# Altium PCB RT_SUPER_B1.PCBdoc (part 1 of 3)
Units mil, origin at the board's own origin, x right, y up, seen from the top; angles counter-clockwise.
Board outline 1617.06 x 1691.18 mil, 4 copper layers (Top Layer, GND, PWR, Bottom Layer), stack 39.556 mil thick; 138 components, 99 nets, 466 pads, 206 vias.
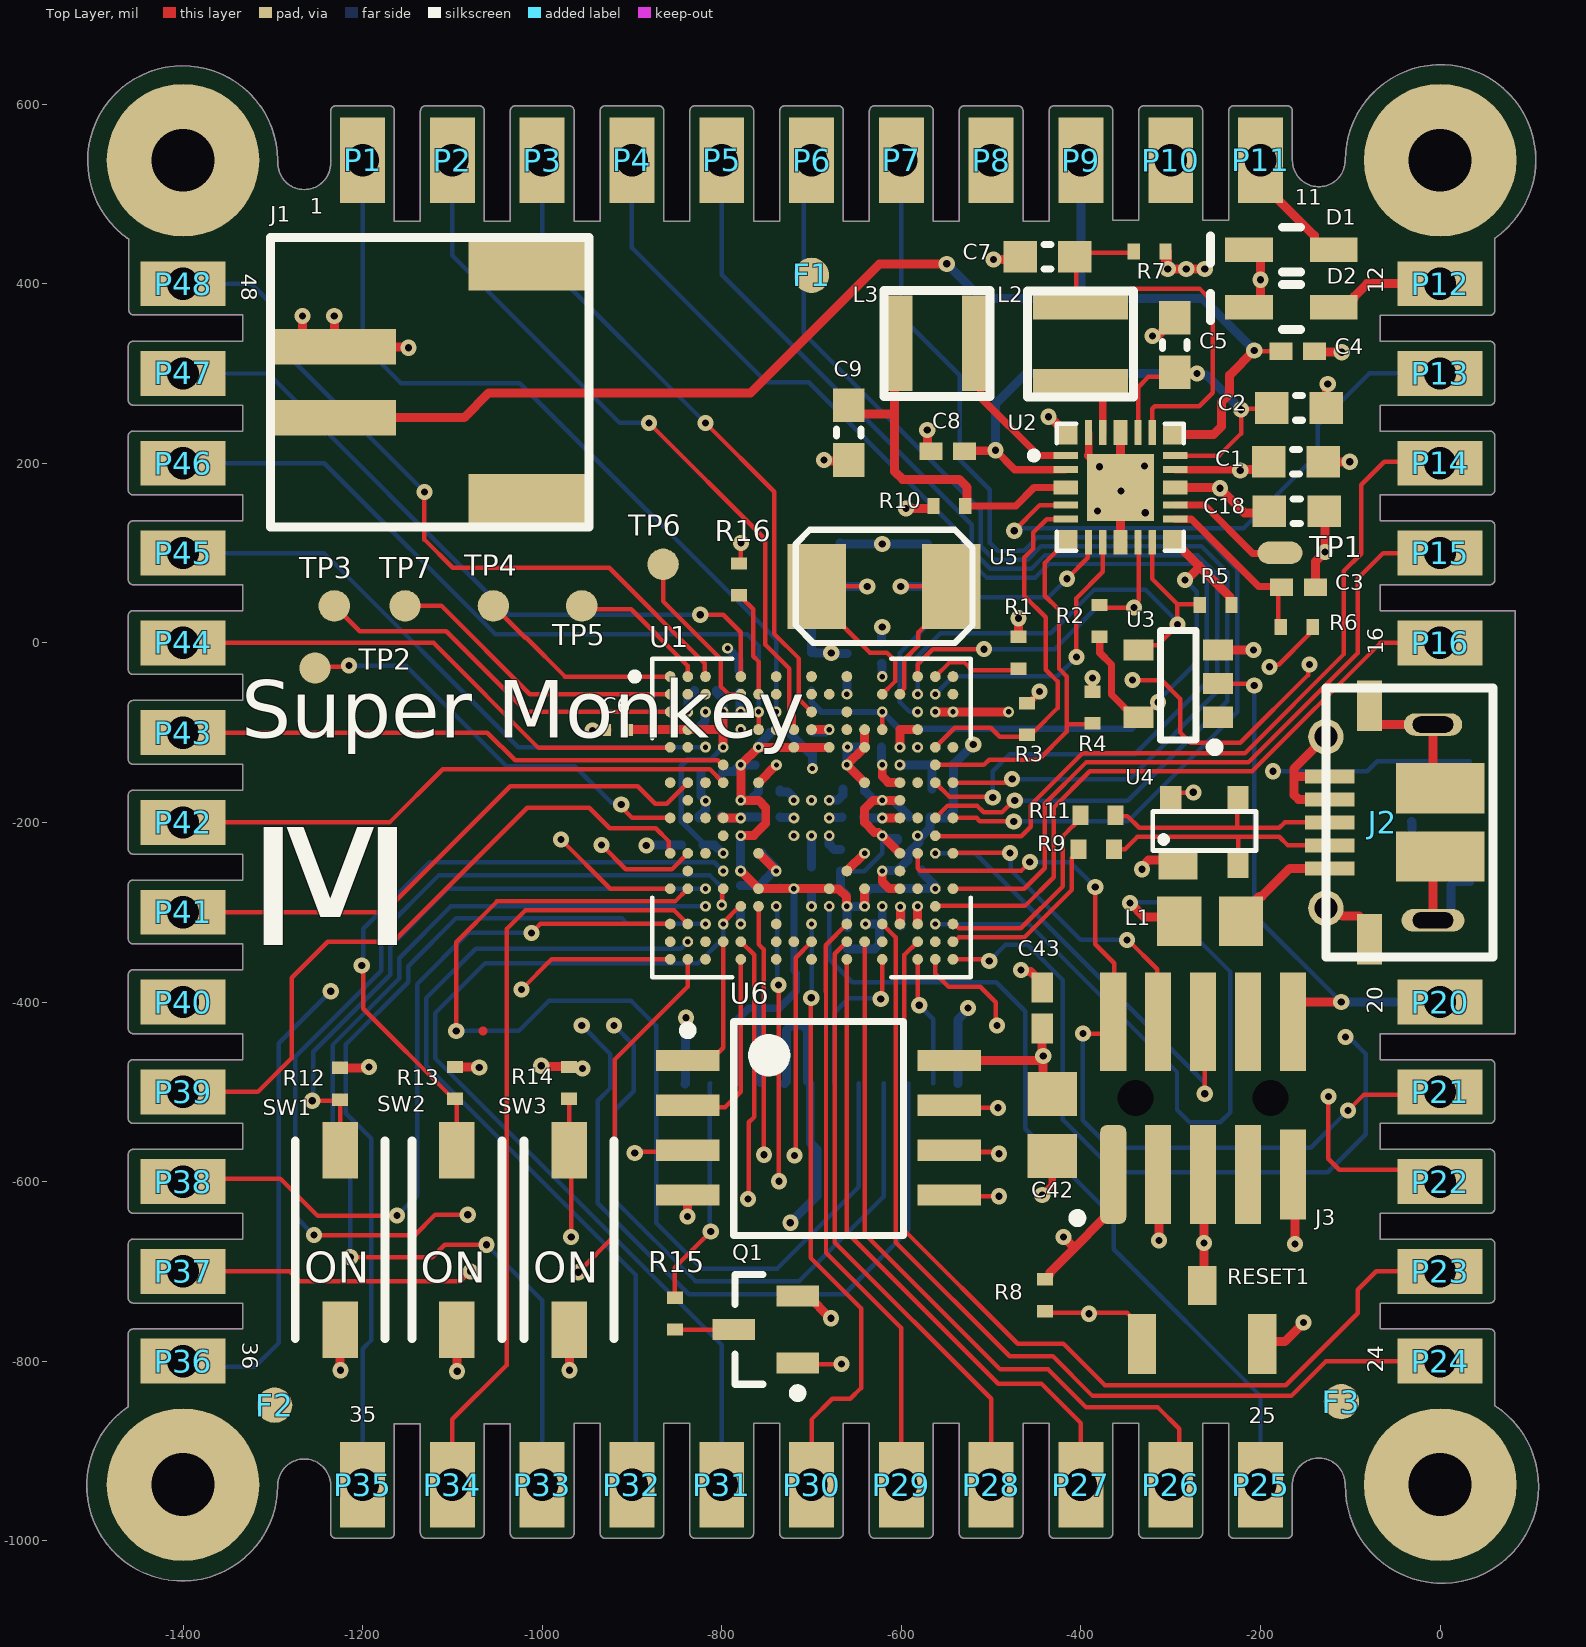
[diagram p0: Top Layer view]
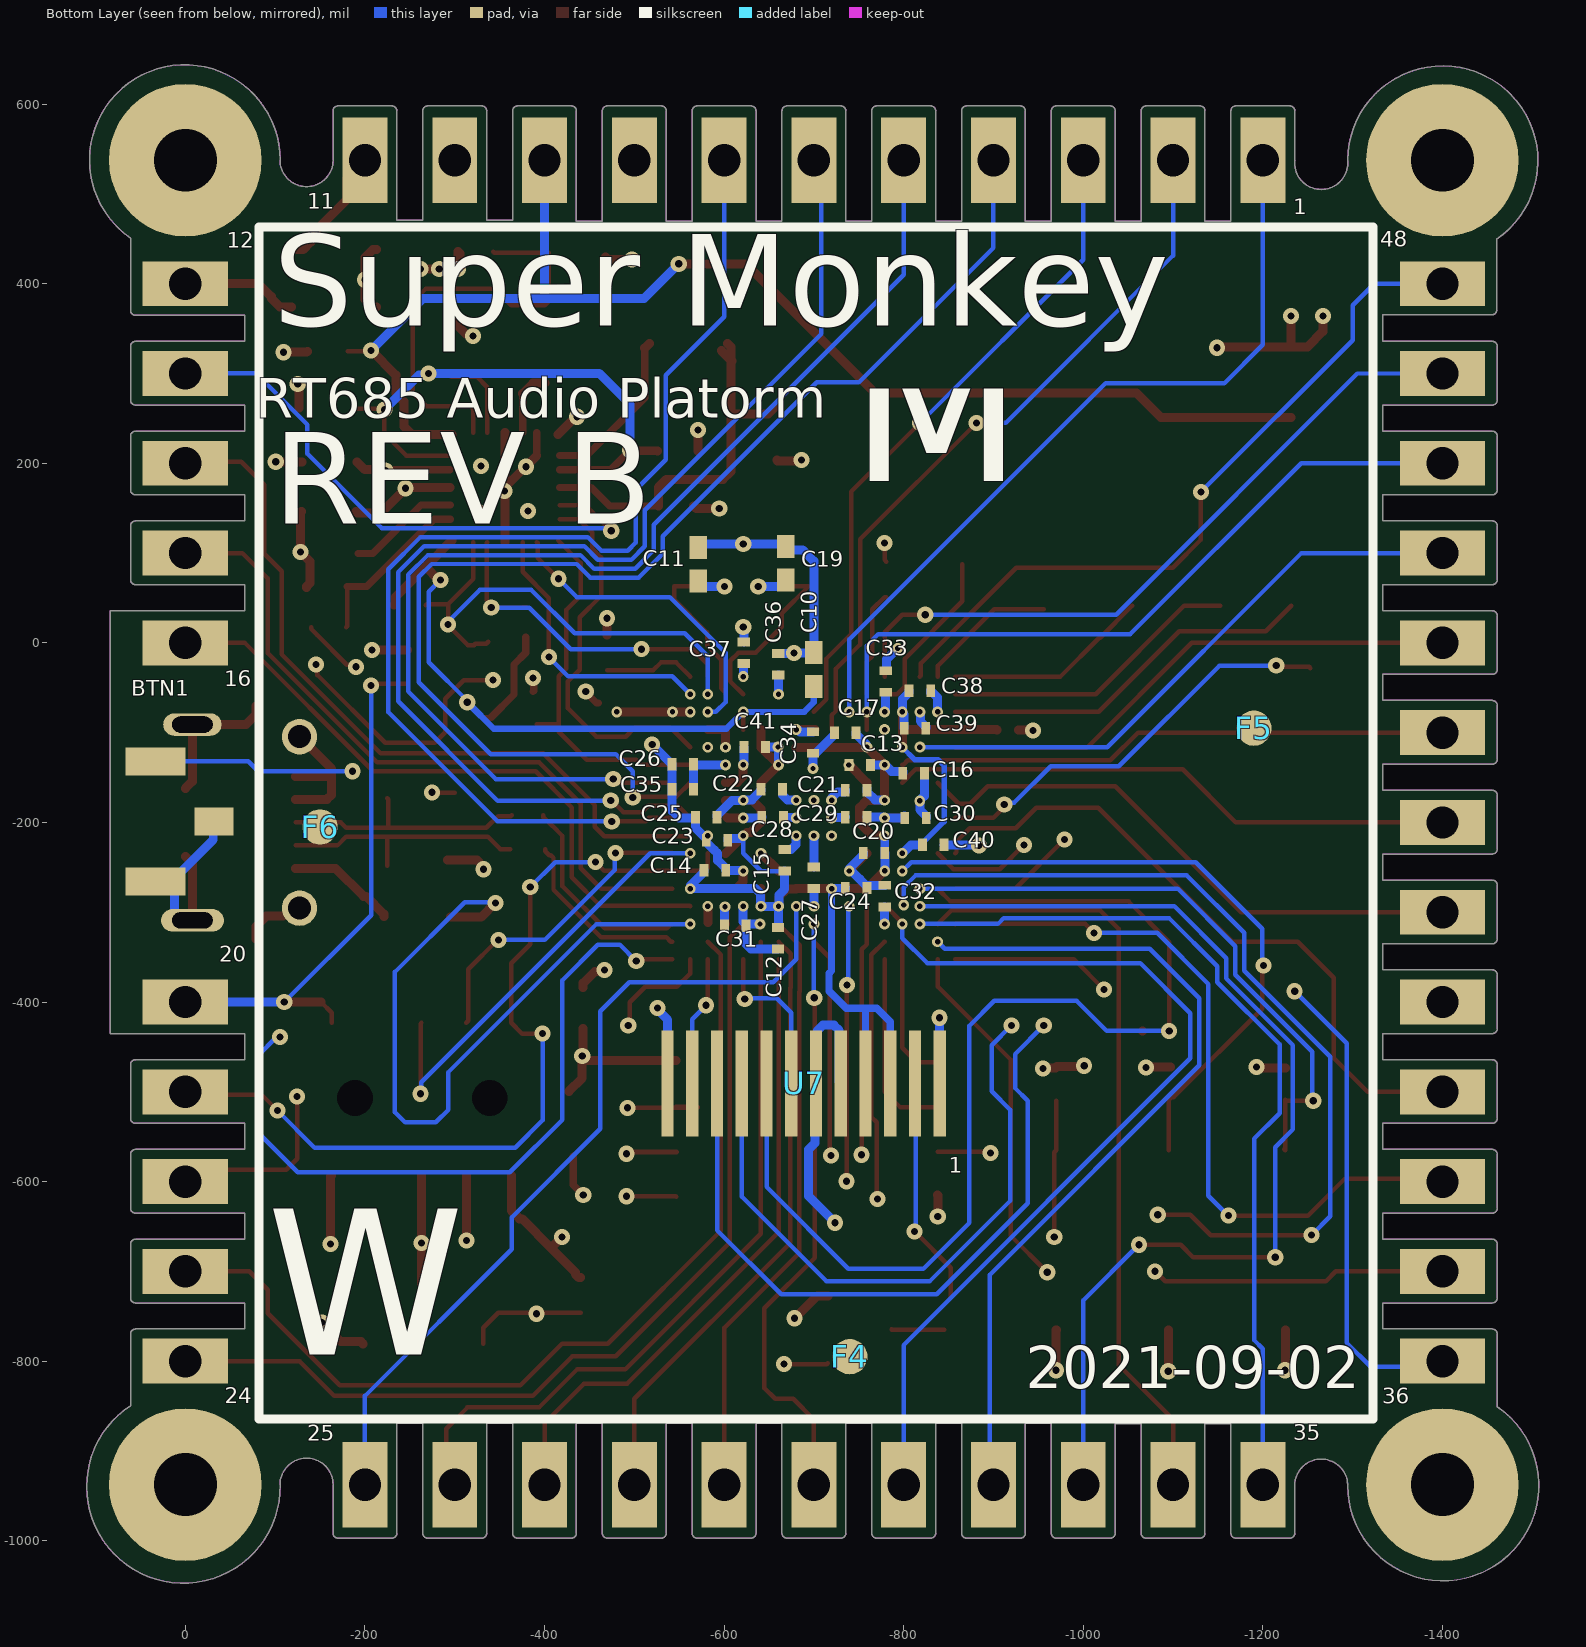
[diagram p1: Bottom Layer view, seen from below]
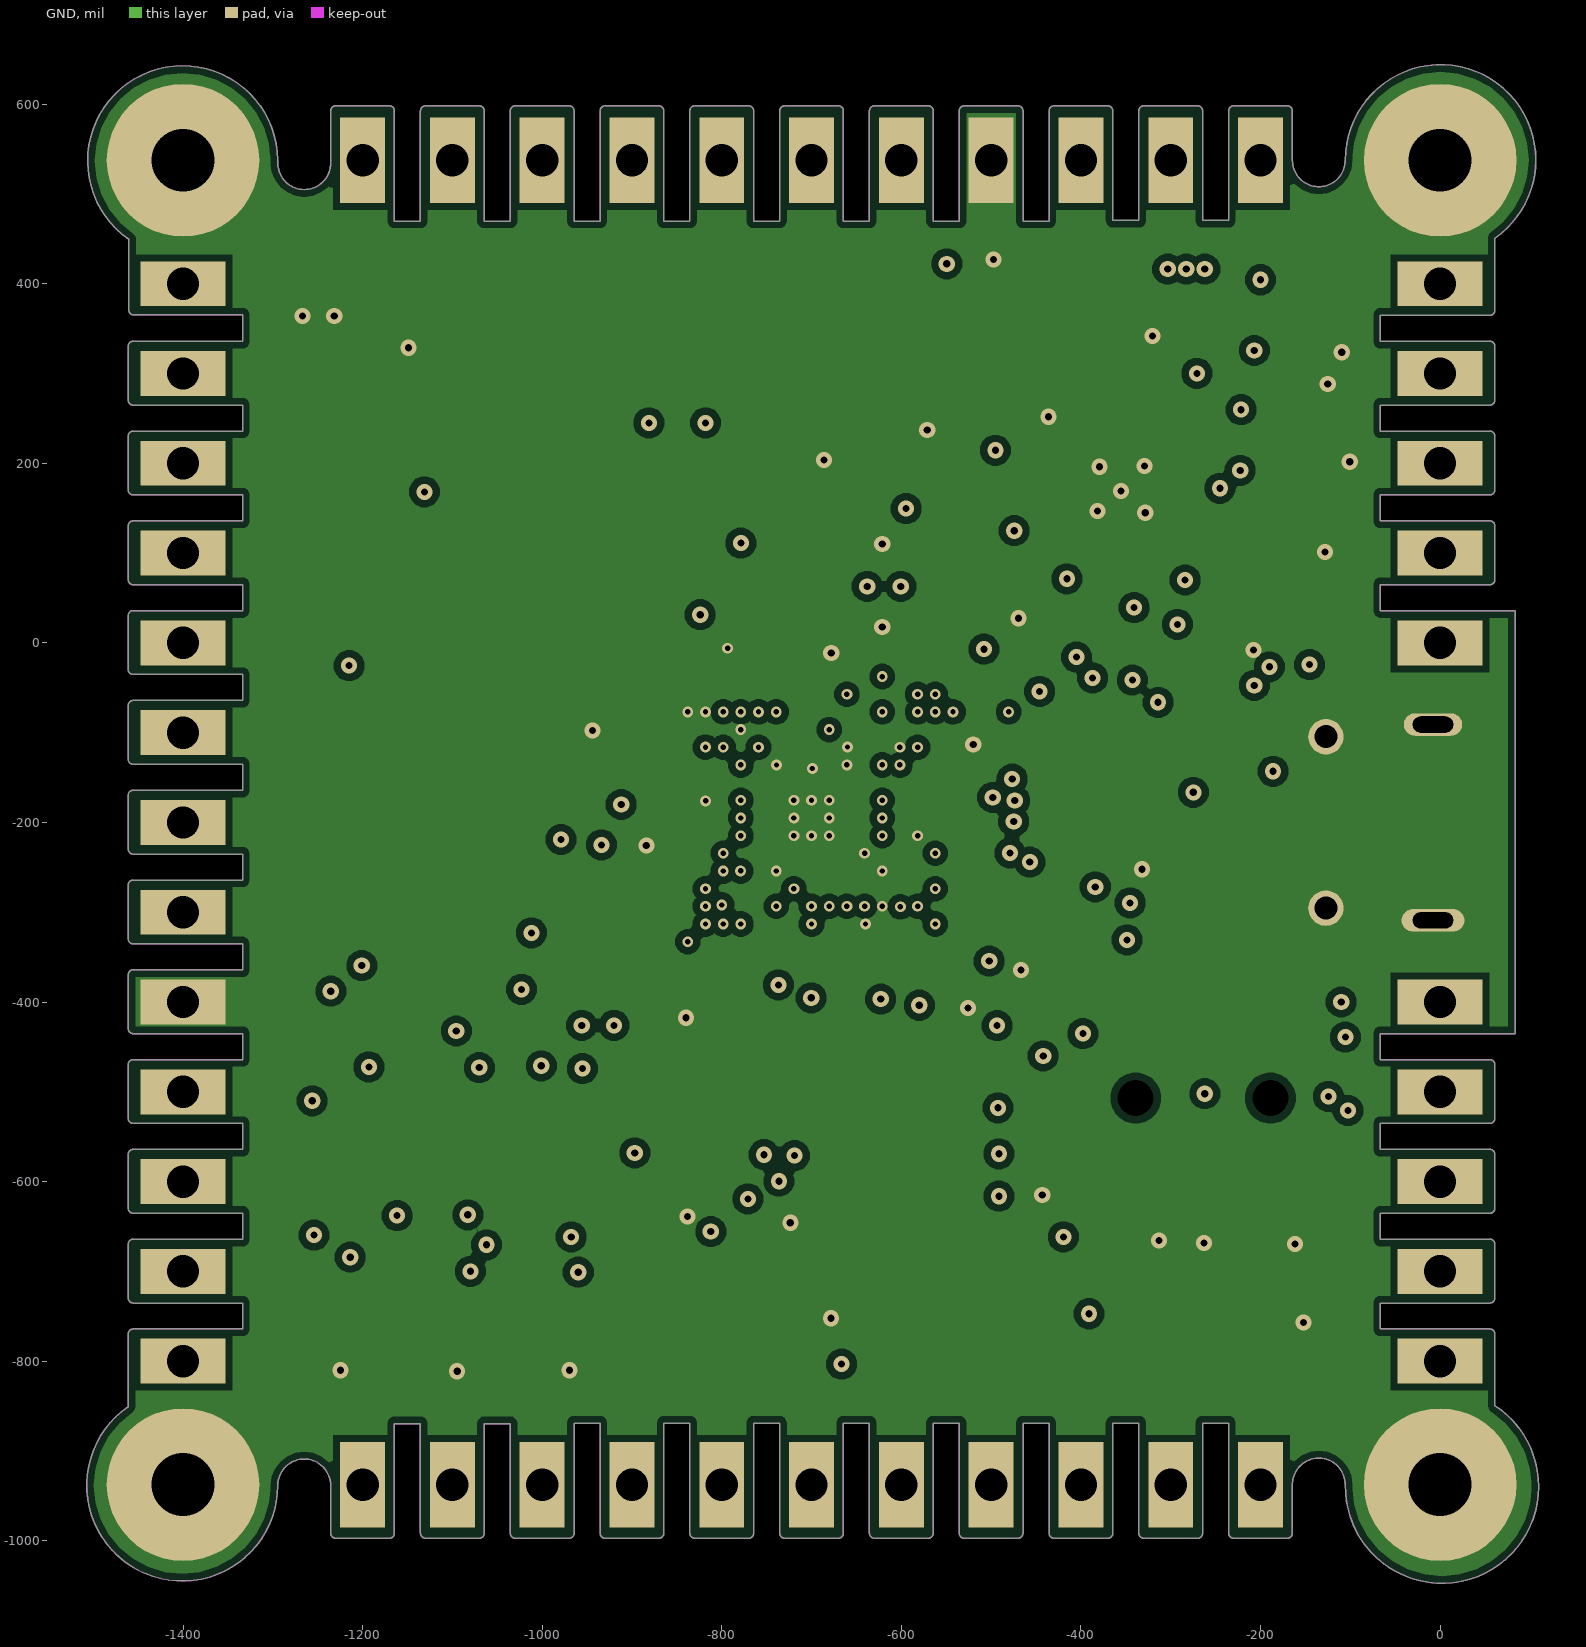
[diagram p2: GND]
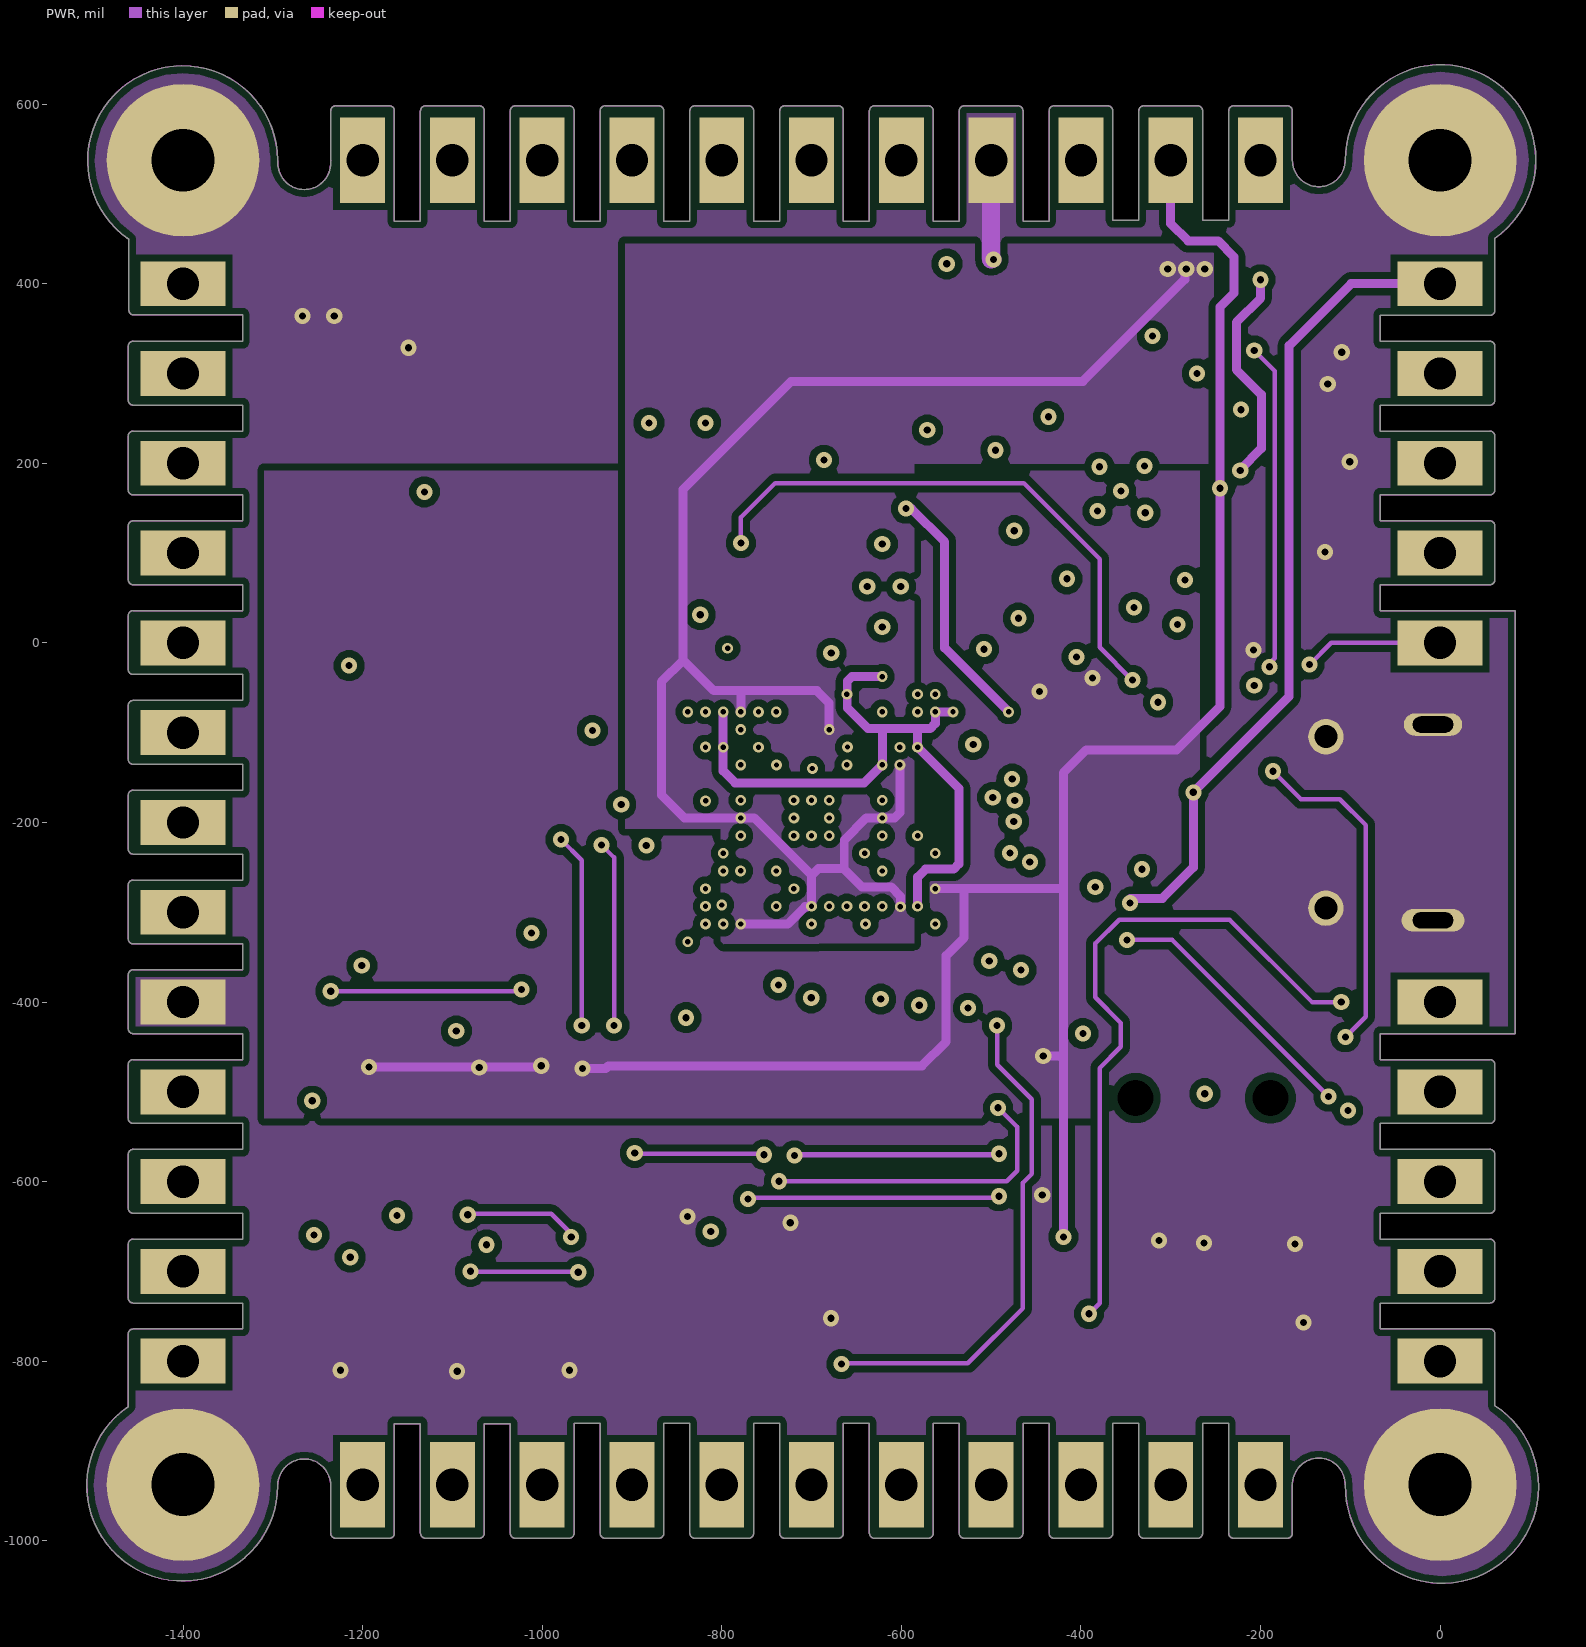
[diagram p3: PWR]
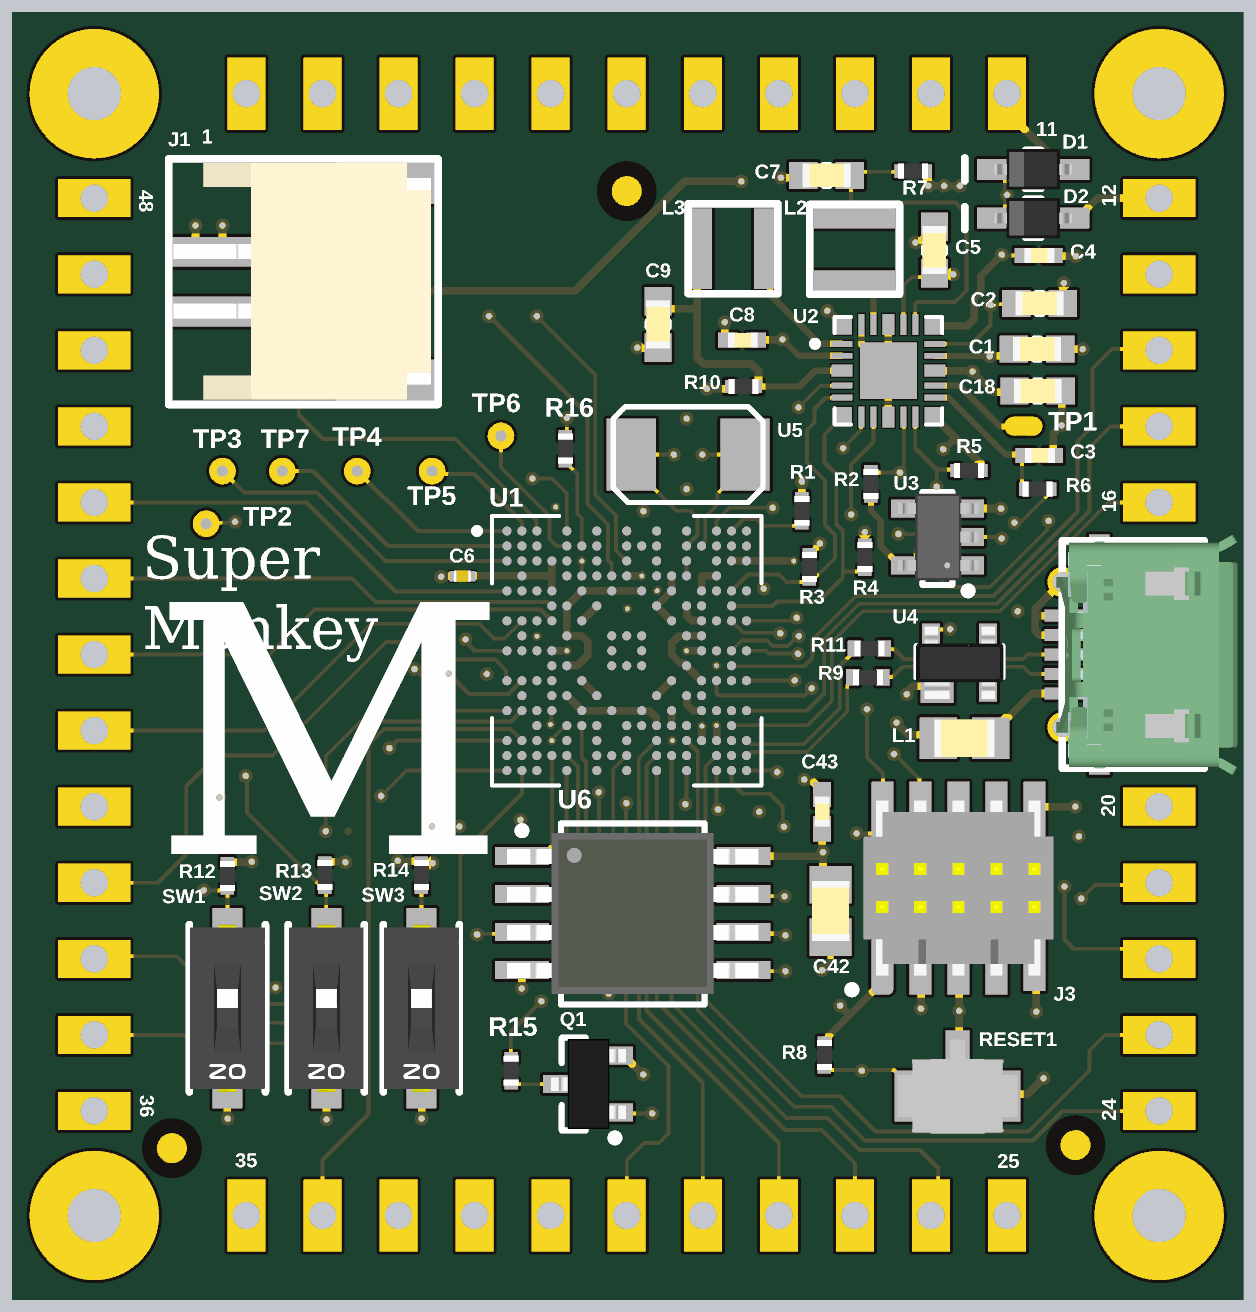
[diagram p5: 3D render of the assembled board from above, using the file's embedded part models]
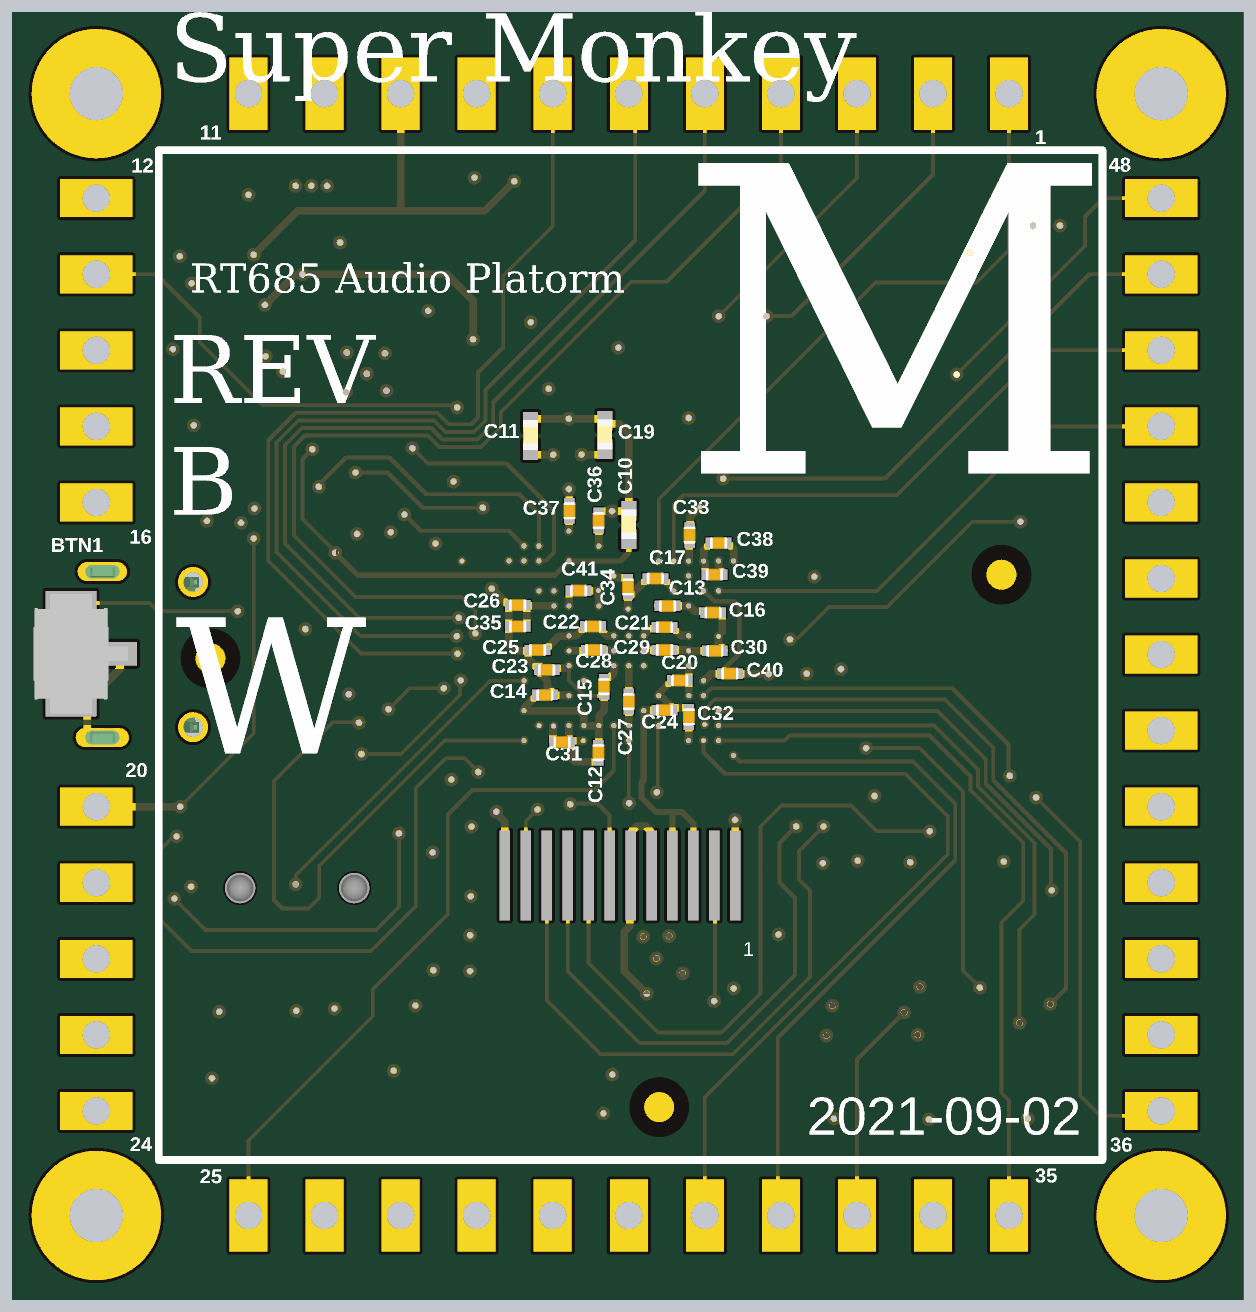
[diagram p6: 3D render of the assembled board from below, using the file's embedded part models]

## Layer stack, top to bottom
Top Solder: solder mask 0.4, Solder Resist, Dk 3.5
Top Layer: signal copper 1.4
Dielectric 1: prepreg 2.8, PP-006, Dk 4.1
GND: signal copper 1.378
Dielectric1: dielectric 28.4, FR-4, Dk 4.8
PWR: signal copper 1.378
Dielectric 2: prepreg 2.8, PP-006, Dk 4.1
Bottom Layer: signal copper 1.4
Bottom Solder: solder mask 0.4, Solder Resist, Dk 3.5

## Board outline
-1461.03,-850.63 -1461.03,-769.66 cw(c-1455.5,-769.66) -1455.5,-764.13 -1333.63,-764.13 -1333.63,-735.19 -1455.5,-735.19 cw(c-1455.5,-729.66) -1461.03,-729.66 -1461.03,-669.66 cw(c-1455.5,-669.66) -1455.5,-664.13 -1333.63,-664.13 -1333.63,-635.19 -1455.5,-635.19 cw(c-1455.5,-629.66) -1461.03,-629.66 -1461.03,-569.66 cw(c-1455.5,-569.66) -1455.5,-564.13 -1333.63,-564.13 -1333.63,-535.19 -1455.5,-535.19 cw(c-1455.5,-529.66) -1461.03,-529.66 -1461.03,-469.66 cw(c-1455.5,-469.66) -1455.5,-464.13 -1333.63,-464.13 -1333.63,-435.19 -1455.5,-435.19 cw(c-1455.5,-429.66) -1461.03,-429.66 -1461.03,-369.66 cw(c-1455.5,-369.66) -1455.5,-364.13 -1333.63,-364.13 -1333.63,-335.19 -1455.5,-335.19 cw(c-1455.5,-329.66) -1461.03,-329.66 -1461.03,-269.66 cw(c-1455.5,-269.66) -1455.5,-264.13 -1333.63,-264.13 -1333.63,-235.19 -1455.5,-235.19 cw(c-1455.5,-229.66) -1461.03,-229.66 -1461.03,-169.66 cw(c-1455.5,-169.66) -1455.5,-164.13 -1333.63,-164.13 -1333.63,-135.19 -1455.5,-135.19 cw(c-1455.5,-129.66) -1461.03,-129.66 -1461.03,-69.66 cw(c-1455.5,-69.66) -1455.5,-64.13 -1333.63,-64.13 -1333.63,-35.19 -1455.5,-35.19 cw(c-1455.5,-29.66) -1461.03,-29.66 -1461.03,30.34 cw(c-1455.5,30.34) -1455.5,35.87 -1333.63,35.87 -1333.63,64.81 -1455.5,64.81 cw(c-1455.5,70.34) -1461.03,70.34 -1461.03,130.34 cw(c-1455.5,130.34) -1455.5,135.87 -1333.63,135.87 -1333.63,164.81 -1455.5,164.81 cw(c-1455.5,170.34) -1461.03,170.34 -1461.03,230.34 cw(c-1455.5,230.34) -1455.5,235.87 -1333.63,235.87 -1333.63,264.81 -1455.5,264.81 cw(c-1455.5,270.34) -1461.03,270.34 -1461.03,330.34 cw(c-1455.5,330.34) -1455.5,335.87 -1333.63,335.87 -1333.63,365.18 -1454.87,365.18 cw(c-1454.87,370.71) -1460.4,370.71 -1460.4,449.52 cw(c-1400.38,536.76) -1294.49,537.66 cw(c-1301.76,537.3) -1294.49,537.02 ccw(c-1264.99,534.52) -1235.38,534.29 ccw(c-1264.95,534.29) -1235.5,536.96 cw(c-1230.02,537.5) -1235.53,537.5 -1235.53,592.5 cw(c-1230,592.5) -1230,598.03 -1170,598.03 cw(c-1170,592.5) -1164.47,592.5 -1164.47,469.76 -1135.53,469.76 -1135.53,592.5 cw(c-1130,592.5) -1130,598.03 -1070,598.03 cw(c-1070,592.5) -1064.47,592.5 -1064.47,469.76 -1035.53,469.76 -1035.53,592.5 cw(c-1030,592.5) -1030,598.03 -970,598.03 cw(c-970,592.5) -964.47,592.5 -964.47,469.76 -935.53,469.76 -935.53,592.5 cw(c-930,592.5) -930,598.03 -870,598.03 cw(c-870,592.5) -864.47,592.5 -864.47,469.76 -835.53,469.76 -835.53,592.5 cw(c-830,592.5) -830,598.03 -770,598.03 cw(c-770,592.5) -764.47,592.5 -764.47,469.76 -735.53,469.76 -735.53,592.5 cw(c-730,592.5) -730,598.03 -670,598.03 cw(c-670,592.5) -664.47,592.5 -664.47,469.76 -635.53,469.76 -635.53,592.5 cw(c-630,592.5) -630,598.03 -570,598.03 cw(c-570,592.5) -564.47,592.5 -564.47,469.76 -535.53,469.76 -535.53,592.5 cw(c-530,592.5) -530,598.03 -470,598.03 cw(c-470,592.5) -464.47,592.5 -464.47,469.76 -435.53,469.76 -435.53,592.5 cw(c-430,592.5) -430,598.03 -370,598.03 cw(c-370,592.5) -364.47,592.5 -364.47,470.63 -335.53,470.63 -335.53,592.5 cw(c-330,592.5) -330,598.03 -270,598.03 cw(c-270,592.5) -264.47,592.5 -264.47,470.63 -235.53,470.63 -235.53,592.5 cw(c-230,592.5) -230,598.03 -170,598.03 cw(c-170,592.5) -164.47,592.5 -164.47,537.5 ccw(c-135,537.5) -105.53,537.5 cw(c0.58,537.76) 106.69,537.9 cw(c0.62,537.9) 61.04,450.73 61.04,370.34 cw(c55.51,370.34) 55.51,364.81 -66.36,364.81 -66.36,335.87 55.51,335.87 cw(c55.51,330.34) 61.04,330.34 61.04,270.34 cw(c55.51,270.34) 55.51,264.81 -66.36,264.81 -66.36,235.87 55.51,235.87 cw(c55.51,230.34) 61.04,230.34 61.04,170.34 cw(c55.51,170.34) 55.51,164.81 -66.36,164.81 -66.36,135.87 55.51,135.87 cw(c55.51,130.34) 61.04,130.34 61.04,70.34 cw(c55.51,70.34) 55.51,64.81 -66.36,64.81 -66.36,35.87 83,35.87 cw(c83,35.36) 83.52,35.36 83.52,-434.67 cw(c83,-434.67) 83,-435.19 -66.36,-435.19 -66.36,-464.13 55.51,-464.13 cw(c55.51,-469.66) 61.04,-469.66 61.04,-529.66 cw(c55.51,-529.66) 55.51,-535.19 -66.36,-535.19 -66.36,-564.13 55.51,-564.13 cw(c55.51,-569.66) 61.04,-569.66 61.04,-629.66 cw(c55.51,-629.66) 55.51,-635.19 -66.36,-635.19 -66.36,-664.13 55.51,-664.13 cw(c55.51,-669.66) 61.04,-669.66 61.04,-729.66 cw(c55.51,-729.66) 55.51,-735.19 -66.36,-735.19 -66.36,-764.13 55.51,-764.13 cw(c55.51,-769.66) 61.04,-769.66 61.04,-849.47 cw(c2.14,-939.63) 109.83,-939.63 cw(c2.14,-939.63) -105.53,-937.49 ccw(c-135,-937.45) -164.47,-937.5 -164.47,-991.59 cw(c-170,-991.59) -170,-997.12 -230,-997.12 cw(c-230,-991.59) -235.53,-991.59 -235.53,-868.86 -264.47,-868.86 -264.47,-991.59 cw(c-270,-991.59) -270,-997.12 -330,-997.12 cw(c-330,-991.59) -335.53,-991.59 -335.53,-868.86 -364.47,-868.86 -364.47,-991.59 cw(c-370,-991.59) -370,-997.12 -430,-997.12 cw(c-430,-991.59) -435.53,-991.59 -435.53,-868.86 -464.47,-868.86 -464.47,-991.59 cw(c-470,-991.59) -470,-997.12 -530,-997.12 cw(c-530,-991.59) -535.53,-991.59 -535.53,-868.86 -564.47,-868.86 -564.47,-991.59 cw(c-570,-991.59) -570,-997.12 -630,-997.12 cw(c-630,-991.59) -635.53,-991.59 -635.53,-868.86 -664.47,-868.86 -664.47,-991.59 cw(c-670,-991.59) -670,-997.12 -730,-997.12 cw(c-730,-991.59) -735.53,-991.59 -735.53,-868.86 -764.47,-868.86 -764.47,-991.59 cw(c-770,-991.59) -770,-997.12 -830,-997.12 cw(c-830,-991.59) -835.53,-991.59 -835.53,-868.86 -864.47,-868.86 -864.47,-991.59 cw(c-870,-991.59) -870,-997.12 -930,-997.12 cw(c-930,-991.59) -935.53,-991.59 -935.53,-868.86 -964.47,-868.86 -964.47,-991.59 cw(c-970,-991.59) -970,-997.12 -1030,-997.12 cw(c-1030,-991.59) -1035.53,-991.59 -1035.53,-869.72 -1064.47,-869.72 -1064.47,-991.59 cw(c-1070,-991.59) -1070,-997.12 -1130,-997.12 cw(c-1130,-991.59) -1135.53,-991.59 -1135.53,-869.72 -1164.47,-869.72 -1164.47,-991.59 cw(c-1170,-991.59) -1170,-997.12 -1230,-997.12 cw(c-1230,-991.59) -1235.53,-991.59 -1235.53,-937.5 ccw(c-1265.01,-938.49) -1294.47,-937.3 cw(c-1427.83,-938.74) -1294.47,-938.37 cw(c-1400.86,-938.37)

## Design rules (kind name [scope] priority, off if disabled: settings)
Clearance [All] p1: gap=5 ignorepadtopadclearanceinfootprint=FALSE except(8: Arc-Poly Track-Poly SMDPad-Poly THPad-Poly Via-Poly Fill-Poly Poly-Poly)
ComponentClearance ComponentClearance_1 [HasFootprint('ER-TFT1.54-1')] p1: gap=0 collisioncheckmode=3 verticalgap=0 showdistances=FALSE
ComponentClearance [All] p2: gap=10 collisioncheckmode=3 verticalgap=10 showdistances=FALSE
PlaneClearance [All] p1: clearance=10
PolygonConnect PolygonConnect_2 [InNet('GND')] p1: thpad.connectstyle=Direct thpad.reliefconductorwidth=10 thpad.reliefentries=4 thpad.polygonreliefangle="90 Angle" thpad.airgapwidth=10 smdpad.connectstyle=Relief smdpad.reliefconductorwidth=10 smdpad.reliefentries=4 smdpad.polygonreliefangle="90 Angle" smdpad.airgapwidth=10 via.connectstyle=Direct via.reliefconductorwidth=10 via.reliefentries=4 via.polygonreliefangle="90 Angle" via.airgapwidth=10
PolygonConnect PolygonConnect_1 [IsVia] p2: connectstyle=Direct reliefconductorwidth=10 reliefentries=4 polygonreliefangle="90 Angle" airgapwidth=10
PolygonConnect [All] p3: connectstyle=Relief reliefconductorwidth=10 reliefentries=4 polygonreliefangle="90 Angle" airgapwidth=5
RoutingVias [All] p1: holewidth=12 width=26 viastyle="Through Hole" minholewidth=6 minwidth=6 maxholewidth=50 maxwidth=75
SilkToSolderMaskClearance SilkscreenOverComponentPads [IsPad] p1: minsilkscreentomaskgap=10 clearancetoexposedcopper=TRUE
SolderMaskExpansion [All] p1: expansion=4 istentingtop=FALSE
Width [All] p1: maxlimit=200 minlimit=5 preferedwidth=5
27 further rules are at their usual default settings.

## Components (designator, comment, footprint, x,y, rotation, side; value= is the part's Value field where it differs from the comment)
BTN1 "B3U-1100P" OMRON_B3U-1100P 33.27,-198.94 r90 bottom
C1 "2.2µF" C0603_0.90MM_MD -160.49,201.7 r180 top
C2 "4.7µF" C0603_1.00MM_MD -157.08,261.7 r0 top
C3 "0.47µF" C0402_0.55MM_HD -157.68,61.89 r180 top
C4 "1µF" C0402_0.55MM_HD -158.49,324.7 r180 top
C5 "2.2µF" C0603_0.90MM_MD -295.49,331.7 r90 top
C6 "0.1uF 6v" C0201_PERFECT -916,-97 r0 top
C7 "10µF" C0603_0.90MM_MD -437.2,430 r0 top
C8 "1µF" C0402_0.55MM_HD -548.43,213.46 r180 top
C9 "10µF" C0603_0.90MM_MD -658.66,234.13 r90 top
C10 "1µF" C0402_0.55MM_HD -700,-29.65 r270 bottom
C11 "18pF" C0402_0.55MM_HD -571.06,87.48 r270 bottom
C12 "0.1uF 6v" C0201_PERFECT -660,-329 r90 bottom
C13 "0.1uF 6v" C0201_PERFECT -751,-136 r180 bottom
C14 "0.1uF 6v" C0201_PERFECT -589.76,-253.07 r0 bottom
C15 "0.1uF 6v" C0201_PERFECT -667.52,-242.24 r270 bottom
C16 "0.1uF 6v" C0201_PERFECT -811,-145 r0 bottom
C17 "0.1uF 6v" C0201_PERFECT -735,-100 r180 bottom
C18 "2.2µF" C0603_0.90MM_MD -159.65,146.54 r180 top
C19 "18pF" C0402_0.55MM_HD -668.5,88.46 r270 bottom
C20 "0.1uF 6v" C0201_PERFECT -767,-234 r180 bottom
C21 "0.1uF 6v" C0201_PERFECT -747,-164 r180 bottom
C22 "0.1uF 6v" C0201_PERFECT -653,-163 r0 bottom
C23 "0.1uF 6v" C0201_PERFECT -592.12,-220 r180 bottom
C24 "0.1uF 6v" C0201_PERFECT -747,-273 r0 bottom
C25 "0.1uF 6v" C0201_PERFECT -580.12,-194 r180 bottom
C26 "0.1uF 6v" C0201_PERFECT -554,-135 r180 bottom
C27 "0.1uF 6v" C0201_PERFECT -700,-261.74 r270 bottom
C28 "0.1uF 6v" C0201_PERFECT -654,-194 r0 bottom
C29 "0.1uF 6v" C0201_PERFECT -747,-194 r180 bottom
C30 "0.1uF 6v" C0201_PERFECT -813.19,-195 r0 bottom
C31 "0.1uF 6v" C0201_PERFECT -612.4,-315.08 r0 bottom
C32 "0.1uF 6v" C0201_PERFECT -779,-282 r270 bottom
C33 "0.1uF 6v" C0201_PERFECT -780,-43 r270 bottom
C34 "0.1uF 6v" C0201_PERFECT -699,-111 r90 bottom
C35 "0.1uF 6v" C0201_PERFECT -554,-163 r180 bottom
C36 "0.1uF 6v" C0201_PERFECT -660.43,-23.82 r270 bottom
C37 "0.1uF 6v" C0201_PERFECT -622,-10.94 r270 bottom
C38 "0.1uF 6v" C0201_PERFECT -818.11,-53.27 r0 bottom
C39 "0.1uF 6v" C0201_PERFECT -812.59,-95 r0 bottom
C40 "0.1uF 6v" C0201_PERFECT -833,-225 r0 bottom
C41 "0.1uF 6v" C0201_PERFECT -634,-116 r0 bottom
C42 "4.7µF" C0805_1.45MM_MD -432,-537 r90 top
C43 "0.1µF" C0402_0.55MM_MD -443.11,-406.61 r90 top
D1 "BAT760-7" D_SOD-323_P -165.55,437.87 r180 top
D2 "BAT760-7" D_SOD-323_P -165.55,373.9 r180 top
F1 "PCB Fiducial" "Fiducial 1mm - 2mm" -700,409.33 r0 top
F2 "PCB Fiducial" "Fiducial 1mm - 2mm" -1298,-849 r0 top
F3 "PCB Fiducial" "Fiducial 1mm - 2mm" -110,-845 r0 top
F4 "PCB Fiducial" "Fiducial 1mm - 2mm" -740,-795 r180 bottom
F5 "PCB Fiducial" "Fiducial 1mm - 2mm" -1190,-95 r180 bottom
F6 "PCB Fiducial" "Fiducial 1mm - 2mm" -150,-205 r180 bottom
J1 "S2B-PH-SM4-TB(LF)(SN)" S2B-PH-SM4-TB(LF)(SN) -1123.23,290.24 r270 top
J2 "10103594-0001LF" 10103594-0001LF -63.58,-200 r180 top
J3 "FTSH-105-01-F-DV" FTSH-105-01-F-DV-K-A -264,-507 r0 top
L1 "CBC2012T4R7M" C0805_1.45MM_MD -256,-310 r180 top
L2 "2.2µH 1.5A" L_NRH3012 -400.49,332.7 r90 top
L3 "2.2µH 1.5A" L_NRH3012 -560.24,333.54 r180 top
P1 "" CASTELLATED#1 -1200,537.5 r0 top
P2 "" CASTELLATED#1 -1100,537.5 r180 top
P3 "" CASTELLATED#1 -1000,537.5 r180 top
P4 "" CASTELLATED#1 -900,537.5 r180 top
P5 "" CASTELLATED#1 -800,537.5 r180 top
P6 "" CASTELLATED#1 -700,537.5 r180 top
P7 "" CASTELLATED#1 -600,537.5 r180 top
P8 "" CASTELLATED#1 -500,537.5 r180 top
P9 "" CASTELLATED#1 -400,537.5 r180 top
P10 "" CASTELLATED#1 -300,537.5 r180 top
P11 "" CASTELLATED#1 -200,537.5 r180 top
P12 "" CASTELLATED#2 0,405 r90 top
P13 "" CASTELLATED#3 88,365.5 r90 top
P14 "" CASTELLATED#1 0,200 r90 top
P15 "" CASTELLATED#4 -2,101.5 r90 top
P16 "" CASTELLATED#5 0,3.86 r90 top
P20 "" CASTELLATED#6 0,-403.5 r90 top
P21 "" CASTELLATED#4 -2,-498.5 r90 top
P22 "" CASTELLATED#7 -1,-598.5 r90 top
P23 "" CASTELLATED#8 2,-698.5 r90 top
P24 "" CASTELLATED#1 0,-800 r90 top
P25 "" CASTELLATED#1 -200,-937.5 r180 top
P26 "" CASTELLATED#1 -300,-937.5 r0 top
P27 "" CASTELLATED#1 -400,-937.5 r0 top
P28 "" CASTELLATED#1 -500,-937.5 r0 top
P29 "" CASTELLATED#1 -600,-937.5 r0 top
P30 "" CASTELLATED#1 -700,-937.5 r0 top
P31 "" CASTELLATED#1 -800,-937.5 r0 top
P32 "" CASTELLATED#1 -900,-937.5 r0 top
P33 "" CASTELLATED#1 -1000,-937.5 r0 top
P34 "" CASTELLATED#1 -1100,-937.5 r0 top
P35 "" CASTELLATED#1 -1200,-937.5 r0 top
P36 "" CASTELLATED#1 -1400,-800 r90 top
P37 "" CASTELLATED#1 -1400,-700 r90 top
P38 "" CASTELLATED#1 -1400,-600 r90 top
P39 "" CASTELLATED#1 -1400,-500 r90 top
P40 "" CASTELLATED#1 -1400,-400 r90 top
P41 "" CASTELLATED#1 -1400,-300 r90 top
P42 "" CASTELLATED#1 -1400,-200 r90 top
P43 "" CASTELLATED#1 -1400,-100 r90 top
P44 "" CASTELLATED#1 -1400,0 r90 top
P45 "" CASTELLATED#1 -1400,100 r90 top
P46 "" CASTELLATED#1 -1400,200 r90 top
P47 "" CASTELLATED#9 -1404,339.5 r90 top
P48 "" CASTELLATED#10 -1400,393.5 r90 top
Q1 "ZXMN3A01FTA" SOT-23 -751,-764.64 r180 top
R1 "10k" R0402_0.40MM_HD -469.68,-10.94 r270 top
R2 "20k" R0402_0.40MM_HD -379.13,24.49 r270 top
R3 "2.2k" R0402_0.40MM_HD -459.84,-84.76 r90 top
R4 "2.2k" R0402_0.40MM_HD -387.01,-71.97 r90 top
R5 "20k" R0402_0.40MM_HD -250,42 r0 top
R6 "0" R0402_0.40MM_HD -159.65,17.6 r0 top
R7 "0" R0402_0.40MM_HD -323.49,435.7 r0 top
R8 "100k" R0402_0.40MM_HD -440.16,-726.5 r90 top
R9 "0" R0402_0.40MM_MD -383,-230 r180 top
R10 "0" R0402_0.40MM_HD -546.46,152.44 r180 top
R11 "0" R0402_0.40MM_MD -381,-192 r180 top
R12 "100k" R0402_0.40MM_HD -1225,-491 r90 top
R13 "100k" R0402_0.40MM_HD -1097,-490 r90 top
R14 "100k" R0402_0.40MM_HD -970,-490 r90 top
R15 "33" R0402_0.40MM_HD -852,-747 r90 top
R16 "1k" R0402_0.40MM_HD -780.71,70.75 r90 top
RESET1 "B3U-1100P" OMRON_B3U-1100P -264.96,-780.63 r180 top
SW1 "CHS-01TA" CHS-01TA -1225,-585 r0 top
SW2 "CHS-01TA" CHS-01TA -1095,-585 r0 top
SW3 "CHS-01TA" CHS-01TA -970,-585 r0 top
TP1 "SMT_TEST" "SMT_TP - 25 x 50" -178.35,100.28 r90 top
TP2 "SMT_TEST" "SMT_TP - 35" -1253,-28 r90 top
TP3 "SMT_TEST" "SMT_TP - 35" -1231.5,41.22 r0 top
TP4 "SMT_TEST" "SMT_TP - 35" -1054.33,41.22 r0 top
TP5 "SMT_TEST" "SMT_TP - 35" -955.91,41.22 r0 top
TP6 "SMT_TEST" "SMT_TP - 35" -865.35,87.48 r0 top
TP7 "SMT_TEST" "SMT_TP - 35" -1152.76,41.22 r0 top
U1 "MIMXRT685SFVKB" VFBGA176 -700,-195 r0 top locked
U2 "PCA9420BSAZ" PCA9420 -355.99,173.2 r0 top
U3 "SN74AUC1G07DBVR" SOT23-5 -291.54,-45.39 r180 top
U4 "PRTR5V0U2X,215" SOT143B -292,-248 r0 top
U5 "24MHz" ABM3 -619.29,62.87 r0 top
U6 "W25Q64JVSIM" SOIC127P830X200-8L -692.13,-540 r0 top
U7 "ER-TFT1.54-1" ER-TFT1.54-1 -688.57,-490.5 r180 bottom locked

## Footprints (in the part's own frame and the unit in brackets; to place one, negate y for a bottom-side part, rotate by r counter-clockwise, add the part's x,y. Pads: shape width x height; smd on the part's side, far side on the other; paste and mask are expansions set on the pad)
10103594-0001LF [mm] "USB uB"
  rect 1.4x0.4 smd: 1(1.506,1.3) 2(1.506,0.65) 3(1.506,0) 4(1.506,-0.65) 5(1.506,-1.3)
  rect 2.5x1.425 smd: MOUNT(-1.615,0.962) MOUNT(-1.615,-0.962)
  oval 1.778x0.635 hole 0.457 slot 1.143 at 0 deg: MOUNT(-1.415,2.77)
  oval 1.651x0.635 hole 0.457 slot 1.143 at 0 deg: MOUNT(-1.415,-2.77)
  rect 0.7x1.425 smd: MOUNT(0.385,3.3) MOUNT(0.385,-3.3)
  round 1 hole 0.65: MOUNT(1.615,2.425) MOUNT(1.615,-2.425)
  silkscreen extent -3.11,-3.8 1.62,3.8, body extent -4.23,-4.01 1.81,4.03, height 2.9
ABM3 [mm] "Abracon Crystal 5x3.2mm"
  rect 1.651x2.4 smd: 1(-1.9,0) 2(1.9,0)
  silkscreen extent -2.5,-1.6 2.5,1.6, body extent -2.5,-1.6 2.5,1.6, height 1.3
C0201_PERFECT [mm] "Chip Capacitor, 2-Leads, Body 0.60x0.35mm, IPC High https://www.worthingtonassembly.com/blog/2018/1/29/the-perfect-0201-footprint"
  rect 0.25x0.35 smd mask+0.05: 1(-0.305,0) 2(0.305,0)
  body extent -0.3,-0.2 0.3,0.2, height 0.3
C0402_0.55MM_HD [mm] "Capacitor 0402 0.55mm Height- High Density"
  rect 0.65x0.5 smd: 1(-0.475,0) 2(0.475,0)
  body extent -0.53,-0.25 0.48,0.25, height 0.55
C0402_0.55MM_MD [mm] "Capacitor - 0402 - Medium Density"
  rect 0.85x0.6 smd: 1(-0.575,0) 2(0.575,0)
  body extent -0.5,-0.25 0.5,0.25, height 0.55
C0603_0.90MM_MD [mm] "Capacitor 0603 - Medium Density"
  rect 0.95x0.9 smd: 1(-0.775,0) 2(0.775,0)
  silkscreen extent -0.1,-0.35 0.1,0.35, body extent -0.8,-0.4 0.8,0.4, height 0.9
C0603_1.00MM_MD [mm] "Capacitor 0603 - Medium Density"
  rect 0.95x0.9 smd: 1(-0.775,0) 2(0.775,0)
  silkscreen extent -0.1,-0.35 0.1,0.35, body extent -0.8,-0.4 0.8,0.4, height 1
C0805_1.45MM_MD [mm] "Capacitor - 0805 - Medium Density"
  rect 1.25x1.4 smd: 1(-0.875,0) 2(0.875,0)
  body extent -1,-0.62 1,0.63, height 1.45
CASTELLATED#1 [mil]
  rect 50x95 hole 36: 1(0,0)
CASTELLATED#2 [mil]
  rect 50x95 hole 36: 1(-5,0)
CASTELLATED#3 [mil]
  rect 50x95 hole 36: 1(-65.5,88)
CASTELLATED#4 [mil]
  rect 50x95 hole 36: 1(-1.5,-2)
CASTELLATED#5 [mil]
  rect 50x95 hole 36: 1(-3.86,0)
CASTELLATED#6 [mil]
  rect 50x95 hole 36: 1(3.5,0)
CASTELLATED#7 [mil]
  rect 50x95 hole 36: 1(-1.5,-1)
CASTELLATED#8 [mil]
  rect 50x95 hole 36: 1(-1.5,2)
CASTELLATED#9 [mil]
  rect 50x95 hole 36: 1(-39.5,-4)
CASTELLATED#10 [mil]
  rect 50x95 hole 36: 1(6.5,0)
CHS-01TA [mm]
  rect 1x1.6 smd: 1(0,-4.572) 2(0,0.508)
  silkscreen extent -1.27,-4.83 1.27,0.76, body extent -1.25,-4.83 1.25,0.77, height 2.53
D_SOD-323_P [mm] "SOD-123 Diode - Polarized"
  rect 1.35x0.7 smd: 1(-1.2,0) 2(1.2,0)
  silkscreen extent -0.25,-0.64 2.29,0.64, body extent -1.3,-0.68 1.3,0.67, height 1.1
ER-TFT1.54-1 [mm]
  rect 0.35x3 smd: 1(3.85,0) 2(3.15,0) 3(2.45,0) 4(1.75,0) 5(1.05,0) 6(0.35,0) 7(-0.35,0) 8(-1.05,0) 9(-1.75,0) 10(-2.45,0) 11(-3.15,0) 12(-3.85,0)
  silkscreen extent -15.41,-9.5 16.11,24.22, body extent -15.54,-9.63 16.24,24.35, height 2.1
"Fiducial 1mm - 2mm" [mm] "1mm Pad 2mm Opening"
  round 1 smd paste-10 mask+0.5: 1(0,0)
FTSH-105-01-F-DV-K-A [mil] "Samtec FTSH-105-01-F-DV-K-A SMT Connector"
  rrect50% 29x110 smd: 1(-100,-85)
  rect 29x110 smd: 2(-100,85) 3(-50,-85) 4(-50,85) 5(0,-85) 6(0,85) 7(50,-85) 8(50,85) 10(100,85)
  rect 29x100 smd: 9(100,-85)
  round 5 hole 40 unplated mask+20: A(-75,0) A(75,0)
  silkscreen extent -145,-139 -135,-129, body extent -125,-115 125,115, height 241
L_NRH3012 [mm] "Inductor"
  rect 0.8x2.7 smd: 1(-1.1,0) 2(1.1,0)
  silkscreen extent -1.5,-1.5 1.5,1.5, body extent -1.5,-1.5 1.5,1.5, height 1.2
OMRON_B3U-1100P [mm] "Omron Ultra-small tactile switch B3U 3.0 x 2.5 x 1.2mm"
  rect 0.8x1.7 smd: 1(-1.7,0) 2(1.7,0)
  rect 0.8x1.1 smd: S(0,-1.65)
  body extent -2,-1.9 2,1.25, height 1.61
PCA9420 [mm]
  rect 0.7x0.2 smd mask+0.051: 1(-1.55,0.9) 2(-1.55,0.5) 4(-1.55,-0.5) 5(-1.55,-0.9) 13(1.55,-0.9) 14(1.55,-0.5) 16(1.55,0.5) 17(1.55,0.9)
  rect 0.7x0.4 smd mask+0.051: 3(-1.55,0) 15(1.55,0)
  rect 0.584x0.584 smd mask+0.051: 6(-1.5,-1.5) 12(1.5,-1.5) 18(1.5,1.5) 24(-1.5,1.5)
  rect 0.2x0.7 smd mask+0.051: 7(-0.9,-1.55) 8(-0.5,-1.55) 10(0.5,-1.55) 11(0.9,-1.55) 19(0.9,1.55) 20(0.5,1.55) 22(-0.5,1.55) 23(-0.9,1.55)
  rect 0.4x0.7 smd mask+0.051: 9(0,-1.55) 21(0,1.55)
  rect 1.9x1.9 smd mask+0.051: 25(0,0)
  silkscreen extent -2.55,-1.8 1.8,1.8, body extent -1.5,-1.5 1.5,1.5, height 1
R0402_0.40MM_HD [mm] "Resistor 0402 High Density"
  rect 0.35x0.45 smd: 1(-0.45,0) 2(0.45,0)
  body extent -0.5,-0.25 0.5,0.25, height 0.4
R0402_0.40MM_MD [mm] "Resistor 0402 Medium Density"
  rect 0.45x0.55 smd: 1(-0.5,0) 2(0.5,0)
  body extent -0.5,-0.25 0.5,0.25, height 0.4
S2B-PH-SM4-TB(LF)(SN) [mm] "CONN HEADER PH SIDE 2POS 2MM SMD"
  rect 1x3.5 smd: 1(-1,-2.75) 2(1,-2.75)
  rect 1.5x3.4 smd: M1(3.35,2.75) M2(-3.35,2.75)
  silkscreen extent -4.1,-4.55 4.1,4.45, body extent -3.97,-4.39 3.93,4.21, height 5.6
"SMT_TP - 25 x 50" [mil] ".025\" x .050\" SMT Test pad"
  oval 25x50 smd paste-25: 1(0,0)
"SMT_TP - 35" [mil] ".035\" SMT Test pad"
  round 35 smd paste-10: 1(0,0)
SOIC127P830X200-8L [mm] "SOIC, 8-Leads, Body 6.1x6.2mm (max), Pitch 1.27mm, IPC High Density"
  rect 1.8x0.6 smd: 1(-3.7,1.905) 2(-3.7,0.635) 3(-3.7,-0.635) 4(-3.7,-1.905) 5(3.7,-1.905) 6(3.7,-0.635) 7(3.7,0.635) 8(3.7,1.905)
  silkscreen extent -3.82,-3.05 2.4,3, body extent -4.2,-2.7 4.2,2.68, height 2.3
SOT23-5 [mm] "SOT23, 5-Leads, Body 3.1x2.6mm (max), Pitch 0.95mm, IPC High Density"
  rect 0.85x0.6 smd: 1(-1.125,0.95) 2(-1.125,0) 3(-1.125,-0.95) 4(1.125,-0.95) 5(1.125,0.95)
  silkscreen extent -1.15,-1.5 0.5,1.92, body extent -1.38,-1.45 1.32,1.45, height 1.15
SOT143B [mm] "SOT143B"
  rect 1.1x0.8 smd: 1(0,0)
  rect 0.6x0.7 smd: 2(1.702,0) 3(1.702,1.9) 4(-0.2,1.9)
  silkscreen extent -0.71,0.43 2.21,1.52, body extent -0.7,-0.27 2.22,2.15, height 1
SOT-23 [mm] "SOT-23"
  rect 1.2x0.6 smd: 1(-0.9,0.95) 2(-0.9,-0.95) 3(0.9,0)
  silkscreen extent -1.03,-1.55 0.87,1.92, body extent -1.27,-1.5 1.23,1.5, height 1.07
VFBGA176 [mil]
  round 12 smd paste+0 mask+0: A1(-157.48,157.48) A2(-137.8,157.48) A3(-118.11,157.48) A5(-78.74,157.48) A7(-39.37,157.48) A9(0,157.48) A11(39.37,157.48) A13(78.74,157.48) A15(118.11,157.48) A16(137.8,157.48) A17(157.48,157.48) B1(-157.48,137.8) B2(-137.8,137.8) B3(-118.11,137.8) B5(-78.74,137.8) B6(-59.06,137.8) B7(-39.37,137.8) B9(0,137.8) B10(19.69,137.8) B11(39.37,137.8) B13(78.74,137.8) B14(98.43,137.8) B15(118.11,137.8) B16(137.8,137.8) B17(157.48,137.8) C1(-157.48,118.11) C2(-137.8,118.11) C3(-118.11,118.11) C4(-98.43,118.11) C5(-78.74,118.11) C7(-39.37,118.11) C9(0,118.11) C11(39.37,118.11) C13(78.74,118.11) C15(118.11,118.11) C16(137.8,118.11) C17(157.48,118.11) D2(-137.8,98.43) D5(-78.74,98.43) D6(-59.06,98.43) D7(-39.37,98.43) D8(-19.68,98.43) D9(0,98.43) D11(39.37,98.43) D12(59.06,98.43) D13(78.74,98.43) D15(118.11,98.43) E1(-157.48,78.74) E2(-137.8,78.74) E3(-118.11,78.74) E4(-98.43,78.74) E6(-59.06,78.74) E8(-19.68,78.74) E10(19.69,78.74) E12(59.06,78.74) E14(98.43,78.74) E15(118.11,78.74) E16(137.8,78.74) E17(157.48,78.74) F4(-98.43,59.06) F5(-78.74,59.06) F7(-39.37,59.06) F11(39.37,59.06) F13(78.74,59.06) F14(98.43,59.06) F16(137.8,59.06) G1(-157.48,39.37) G2(-137.8,39.37) G3(-118.11,39.37) G4(-98.43,39.37) G6(-59.06,39.37) G12(59.06,39.37) G14(98.43,39.37) G15(118.11,39.37) G16(137.8,39.37) G17(157.48,39.37) H2(-137.8,19.68) H5(-78.74,19.68) H8(-19.68,19.68) H9(0,19.68) H10(19.69,19.68) H13(78.74,19.68) H14(98.43,19.68) J1(-157.48,0) J2(-137.8,0) J3(-118.11,0) J4(-98.43,0) J8(-19.68,0) J10(19.69,0) J14(98.43,0) J15(118.11,0) J16(137.8,0) J17(157.48,0) K4(-98.43,-19.69) K5(-78.74,-19.69) K8(-19.68,-19.69) K9(0,-19.69) K10(19.69,-19.69) K13(78.74,-19.69) K16(137.8,-19.69) L1(-157.48,-39.37) L2(-137.8,-39.37) L3(-118.11,-39.37) L4(-98.43,-39.37) L6(-59.06,-39.37) L12(59.06,-39.37) L14(98.43,-39.37) L15(118.11,-39.37) L16(137.8,-39.37) L17(157.48,-39.37) M2(-137.8,-59.06) M4(-98.43,-59.06) M5(-78.74,-59.06) M7(-39.37,-59.06) M11(39.37,-59.06) M13(78.74,-59.06) M14(98.43,-59.06) N1(-157.48,-78.74) N2(-137.8,-78.74) N3(-118.11,-78.74) N4(-98.43,-78.74) N6(-59.06,-78.74) N8(-19.68,-78.74) N10(19.69,-78.74) N12(59.06,-78.74) N14(98.43,-78.74) N15(118.11,-78.74) N16(137.8,-78.74) N17(157.48,-78.74) P3(-118.11,-98.43) P5(-78.74,-98.43) P6(-59.06,-98.43) P7(-39.37,-98.43) P9(0,-98.43) P10(19.69,-98.43) P11(39.37,-98.43) P12(59.06,-98.43) P13(78.74,-98.43) P16(137.8,-98.43) R1(-157.48,-118.11) R2(-137.8,-118.11) R3(-118.11,-118.11) R5(-78.74,-118.11) R7(-39.37,-118.11) R9(0,-118.11) R11(39.37,-118.11) R13(78.74,-118.11) R14(98.43,-118.11) R15(118.11,-118.11) R16(137.8,-118.11) R17(157.48,-118.11) T1(-157.48,-137.8) T2(-137.8,-137.8) T3(-118.11,-137.8) T4(-98.43,-137.8) T5(-78.74,-137.8) T7(-39.37,-137.8) T8(-19.68,-137.8) T9(0,-137.8) T11(39.37,-137.8) T12(59.06,-137.8) T13(78.74,-137.8) T15(118.11,-137.8) T16(137.8,-137.8) T17(157.48,-137.8) U1(-157.48,-157.48) U2(-137.8,-157.48) U3(-118.11,-157.48) U5(-78.74,-157.48) U7(-39.37,-157.48) U9(0,-157.48) U11(39.37,-157.48) U13(78.74,-157.48) U15(118.11,-157.48) U16(137.8,-157.48) U17(157.48,-157.48)
  silkscreen extent -201,-177 177,177, body extent -177,-177 177,177, height 34

## Part data
BTN1 RESET1: "SWITCH TACTILE SPST-NO 0.05A 12V", Contact Rating @ Voltage="0.05A @ 12VDC", Illumination Type, Color=-, Manufacturer="Omron Electronics Inc-EMC Div", Operating Force=153gf, Operating Temperature="-25°C ~ 70°C", Supplier Part Number 1=SW1021CT-ND, Actuator Height off PCB, from Pins=1.60mm, Actuator Material=-, Actuator Orientation="Top Actuated", Actuator Type=Standard, Category=Switches, CategorySort=700, Circuit=SPST-NO, ComponentLink1Description=http://www.components.omron.com/components/web/PDFLIB.nsf/0/2DD3893C7DD33E9E862572900079E9D6/$file/B3U_1110.pdf, ComponentLink1URL=http://www.components.omron.com/components/web/PDFLIB.nsf/0/2DD3893C7DD33E9E862572900079E9D6/$file/B3U_1110.pdf, Features="Grounding Pin", Illumination=Non-Illuminated, Illumination Voltage (Nominal)=-, Ingress Protection="Dust Proof", Manufacturer Part Number=B3U-1100P, Mechanical Life="200,000 Cycles", Mounting Type="Surface Mount", Outline="3.00mm x 2.50mm", Packaging="Cut Tape (CT)", Pricing 1="1=1.25, 10=1.201, 25=1.1332, 50=0.997, 100=0.9064, 250=0.86108, 500=0.83842, 1000=0.65714 (USD)", RoHS="RoHS Compliant", Stock 1=45170, Supplier 1=Digi-Key, Switch Function=Off-Mom, Switch Travel=0.15mm, Termination Style="SMD (SMT) Tab"
C1 C5 C18: library part GCM188R70J225KE22D, "CAP CER 2.2UF 6.3V X7R 0603", Manufacturer="Murata Electronics", Operating Temperature="-55°C ~ 125°C", Package=0603, Ratings=AEC-Q200, Supplier Part Number 1=490-5316-1-ND, Temperature Coefficient=X7R, Tolerance=±10%, Voltage - Rated=6.3V, Category=Capacitors, ComponentLink1Description="Datasheet (Internal)", ComponentLink1URL=https://search.murata.co.jp/Ceramy/image/img/A01X/G101/ENG/GCM188R70J225KE22-01.pdf, ComponentLink2Description="Datasheet (External)", ComponentLink2URL=https://search.murata.co.jp/Ceramy/image/img/A01X/G101/ENG/GCM188R70J225KE22-01.pdf, Manufacturer Part Number=GCM188R70J225KE22D, Substitution Notes="2.2µF , 6.3V , ±10% , X7R , -55°C ~ 125°C , AEC-Q200 , 0603", Supplier 1=Digikey, Thickness (Max)=0.90MM
C2: library part GCJ188C70J475KE02D, "CAP CER 4.7UF 6.3V X7S 0603", Manufacturer="Murata Electronics", Operating Temperature="-55°C ~ 125°C", Package=0603, Ratings=AEC-Q200, Supplier Part Number 1=490-16480-1-ND, Temperature Coefficient=X7S, Tolerance=±10%, Voltage - Rated=6.3V, Category=Capacitors, ComponentLink1Description="Datasheet (Internal)", ComponentLink1URL=https://search.murata.co.jp/Ceramy/image/img/A01X/G101/ENG/GCJ188C70J475KE02-01.pdf, ComponentLink2Description="Datasheet (External)", ComponentLink2URL=https://search.murata.co.jp/Ceramy/image/img/A01X/G101/ENG/GCJ188C70J475KE02-01.pdf, Manufacturer Part Number=GCJ188C70J475KE02D, Substitution Notes="4.7µF , 6.3V , ±10% , X7S , -55°C ~ 125°C , AEC-Q200 , 0603", Supplier 1=Digikey, Thickness (Max)=1.00MM
C3: library part GRT155R61E474KE01D, "CAP CER 0.47UF 25V X5R 0402", Manufacturer="Murata Electronics", Operating Temperature="-55°C ~ 85°C", Package=0402, Ratings=AEC-Q200, Supplier Part Number 1=490-12269-1-ND, Temperature Coefficient=X5R, Tolerance=±10%, Voltage - Rated=25V, Category=Capacitors, ComponentLink1Description="Datasheet (Internal)", ComponentLink1URL=https://search.murata.co.jp/Ceramy/image/img/A01X/partnumbering_e_02.pdf, ComponentLink2Description="Datasheet (External)", ComponentLink2URL=https://search.murata.co.jp/Ceramy/image/img/A01X/partnumbering_e_02.pdf, Manufacturer Part Number=GRT155R61E474KE01D, Substitution Notes="0.47µF , 25V , ±10% , X5R , -55°C ~ 85°C , AEC-Q200 , 0402", Supplier 1=Digikey, Thickness (Max)=0.55MM
C4 C8 C10: library part GCM155C71A105KE38D, "CAP CER 1UF 10V X7S 0402", Manufacturer="Murata Electronics", Operating Temperature="-55°C ~ 125°C", Package=0402, Ratings=AEC-Q200, Supplier Part Number 1=490-13409-1-ND, Temperature Coefficient=X7S, Tolerance=±10%, Voltage - Rated=10V, Category=Capacitors, ComponentLink1Description="Datasheet (Internal)", ComponentLink1URL=https://www.murata.com/~/media/webrenewal/support/library/catalog/products/capacitor/mlcc/c03e.ashx?la=en-us, ComponentLink2Description="Datasheet (External)", ComponentLink2URL=https://www.murata.com/~/media/webrenewal/support/library/catalog/products/capacitor/mlcc/c03e.ashx?la=en-us, Manufacturer Part Number=GCM155C71A105KE38D, Substitution Notes="1µF , 10V , ±10% , X7S , -55°C ~ 125°C , AEC-Q200 , 0402", Supplier 1=Digikey, Thickness (Max)=0.55MM
C6 C12 C13 C14 C15 C16 C17 C20 C21 C22 C23 C24 C25 C26 C27 C28 C29 C30 C31 C32 C33 C34 C35 C36 C37 C38 C39 C40 C41: library part CC0201KRX5R5BB104, "Cap Ceramic 0.1uF 6.3VDC X5R 10% SMD 0201 Paper T/R", Capacitance=100nF, Case Code (Imperial)=0201, Case Code (Metric)=0603, Dielectric=X5R, Manufacturer=Yageo, Max Operating Temperature=85°C, Min Operating Temperature=-55°C, Package Quantity=1, Resistor Type=Ceramic, Supplier Part Number 1=311-1408-1-ND, Tolerance=10%, Voltage Rating=6.3V, Case/Package=0201, Category="Ceramic Capacitors", ComponentLink1Description=https://datasheet.ciiva.com/176/mlccorderingcode-176765.pdf?src-supplier=Digi-Key, ComponentLink1URL=https://datasheet.ciiva.com/176/mlccorderingcode-176765.pdf?src-supplier=Digi-Key, ComponentLink2Description=https://datasheet.ciiva.com/176/mlccorderingcode-176766.pdf?src-supplier=Digi-Key, ComponentLink2URL=https://datasheet.ciiva.com/176/mlccorderingcode-176766.pdf?src-supplier=Digi-Key, ComponentLink3Description=https://datasheet.ciiva.com/176/mlccorderingcode-176767.pdf?src-supplier=Digi-Key, ComponentLink3URL=https://datasheet.ciiva.com/176/mlccorderingcode-176767.pdf?src-supplier=Digi-Key, ComponentLink4Description=https://datasheet.ciiva.com/28450/1359354-28450200.pdf?src-supplier=Element14, ComponentLink4URL=https://datasheet.ciiva.com/28450/1359354-28450200.pdf?src-supplier=Element14, ComponentLink5Description=https://datasheet.ciiva.com/7656/1525783-7656597.pdf?src-supplier=Element14, ComponentLink5URL=https://datasheet.ciiva.com/7656/1525783-7656597.pdf?src-supplier=Element14, Depth=0.3mm, Halogen Free="Halogen Free", Height=0.3mm, Lead Free="Lead Free", Length=0.6mm, Manufacturer Part Number=CC0201KRX5R5BB104, Mount="Surface Mount", Number of Pins=2, Packaging="Tape and Reel", Pricing="1=0.10000, 10=0.02400, 50=0.01340, 100=0.01090, 500=0.00776, 1000=0.00610, 2500=0.00555, 5000=0.00510 (USD)", REACH SVHC="No SVHC", RoHS=Yes, RoHS Compliant=Yes, Series=CC, Stock=2999877, Supplier 1=Digi-Key, Termination=SMD/SMT, Thickness=0.013inch, Voltage Rating (DC)=6.3V, Width=0.3mm
C7 C9: library part GRT188R61A106ME13D, "CAP CER 10UF 10V X5R 0603", Manufacturer="Murata Electronics", Operating Temperature="-55°C ~ 85°C", Package=0603, Ratings=AEC-Q200, Supplier Part Number 1=490-12312-1-ND, Temperature Coefficient=X5R, Tolerance=±20%, Voltage - Rated=10V, Category=Capacitors, ComponentLink1Description="Datasheet (Internal)", ComponentLink1URL=https://search.murata.co.jp/Ceramy/image/img/A01X/G101/ENG/GRT188R61A106ME13-01.pdf, ComponentLink2Description="Datasheet (External)", ComponentLink2URL=https://search.murata.co.jp/Ceramy/image/img/A01X/G101/ENG/GRT188R61A106ME13-01.pdf, Manufacturer Part Number=GRT188R61A106ME13D, Substitution Notes="10µF , 10V , ±20% , X5R , -55°C ~ 85°C , AEC-Q200 , 0603", Supplier 1=Digikey, Thickness (Max)=0.90MM
C11 C19: library part CGA2B2C0G1H180J050BA, "CAP CER 18PF 50V C0G 0402", Manufacturer="TDK Corporation", Operating Temperature="-55°C ~ 125°C", Package=0402, Ratings=AEC-Q200, Supplier Part Number 1=445-5587-1-ND, Temperature Coefficient="C0G, NP0", Tolerance=±5%, Voltage - Rated=50V, Category=Capacitors, ComponentLink1Description="Datasheet (Internal)", ComponentLink1URL=datasheets\TDK\mlcc_automotive_general_en.pdf, ComponentLink2Description="Datasheet (External)", ComponentLink2URL=https://product.tdk.com/info/en/catalog/datasheets/mlcc_automotive_general_en.pdf, Features=-, Manufacturer Part Number=CGA2B2C0G1H180J050BA, Substitution Notes="18pF , 50V , ±5% , C0G, NP0 , -55°C ~ 125°C , AEC-Q200 , 0402", Supplier 1=Digikey, Thickness (Max)=0.55MM
C42: library part CGA4J3X7R1A475K125AB, "CAP CER 4.7UF 10V X7R 0805", Manufacturer="TDK Corporation", Operating Temperature="-55°C ~ 125°C", Package=0805, Ratings=AEC-Q200, Supplier Part Number 1=445-12730-1-ND, Temperature Coefficient=X7R, Tolerance=±10%, Voltage - Rated=10V, Category=Capacitors, ComponentLink1Description="Datasheet (Internal)", ComponentLink1URL=datasheets\TDK\mlcc_automotive_general_en.pdf, ComponentLink2Description="Datasheet (External)", ComponentLink2URL=https://product.tdk.com/info/en/catalog/datasheets/mlcc_automotive_general_en.pdf, Features=-, Manufacturer Part Number=CGA4J3X7R1A475K125AB, Substitution Notes="4.7µF , 10V , ±10% , X7R , -55°C ~ 125°C , AEC-Q200 , 0805", Supplier 1=Digikey, Thickness (Max)=1.45MM
C43: library part CGA2B1X7R1C104K050BC, "CAP CER 0.1UF 16V X7R 0402", Manufacturer="TDK Corporation", Operating Temperature="-55°C ~ 125°C", Package=0402, Ratings=AEC-Q200, Supplier Part Number 1=445-5613-1-ND, Temperature Coefficient=X7R, Tolerance=±10%, Voltage - Rated=16V, Category=Capacitors, ComponentLink1Description="Datasheet (Internal)", ComponentLink1URL=datasheets\TDK\mlcc_automotive_general_en.pdf, ComponentLink2Description="Datasheet (External)", ComponentLink2URL=https://product.tdk.com/info/en/catalog/datasheets/mlcc_automotive_general_en.pdf, Features=-, Manufacturer Part Number=CGA2B1X7R1C104K050BC, Substitution Notes="0.1µF , 16V , ±10% , X7R , -55°C ~ 125°C , AEC-Q200 , 0402", Supplier 1=Digikey, Thickness (Max)=0.55MM
D1 D2: "DIODE SCHOTTKY 30V 1A SOD323", Capacitance @ Vr- F="25pF @ 5V- 1MHz", Current - Average Rectified (Io)=1A, Current - Reverse Leakage @ Vr="50µA @ 15V", Manufacturer="Diodes Inc", Package="SC-76- SOD-323", Supplier Device Package=SOD-323, Supplier Part Number 1=BAT760DICT-ND, Voltage - DC Reverse (Vr) (Max)=30V, Voltage - Forward (Vf) (Max) @ If="550mV @ 1A", Category=Diodes, CategorySort=400, ComponentLink1Description="Internal Datasheet", ComponentLink1URL=http://www.diodes.com/datasheets/ds30498.pdf, ComponentLink2Description="External Datasheet", ComponentLink2URL=http://www.diodes.com/datasheets/ds30498.pdf, Diode Suffix=1A_2C, Diode Type=Schottky, Manufacturer Part Number=BAT760-7, Mounting Type="Surface Mount", Num Pins=2, Packaging="Cut Tape (CT)", Reverse Recovery Time (trr)=-, SortValue=BAT760-7, Speed="Fast Recovery =< 500ns- > 200mA (Io)", Supplier 1=Digi-Key
F1 F2 F3 F4 F5 F6: library part Fiducial
J1: "CONN HEADER PH SIDE 2POS 2MM SMD", Color=Natural, Manufacturer="JST Sales America Inc", Supplier Part Number 1=455-1749-1-ND, Category="Connectors, Interconnects", ComponentLink1Description=http://www.jst-mfg.com/product/pdf/eng/ePH.pdf, ComponentLink1URL=http://www.jst-mfg.com/product/pdf/eng/ePH.pdf, Connector Type="Header, Shrouded", Contact Finish=Tin, Contact Finish Thickness=-, Contact Mating Length=-, Contact Type="Male Pin", Fastening Type=-, Features="Solder Retention", Manufacturer Part Number=S2B-PH-SM4-TB(LF)(SN), Mounting Type="Surface Mount, Right Angle", Number of Positions=2, Number of Positions Loaded=All, Number of Rows=1, Packaging="Cut Tape (CT)", Pitch="0.079\" (2.00mm)", Pricing 1="1=0.5, 10=0.457, 100=0.3809, 500=0.3047 (USD)", RoHS="RoHS Compliant", Row Spacing=-, Stock 1=17700, Supplier 1=Digi-Key, Termination=Solder
J2: "CONN RCPT STD MICRO USB TYPE B", Manufacturer=FCI, Supplier Part Number 1=609-4050-1-ND, Category="Connectors, Interconnects", ComponentLink1Description=http://portal.fciconnect.com/res/en/pdffiles/doc_search/10103594.pdf, ComponentLink1URL=http://portal.fciconnect.com/res/en/pdffiles/doc_search/10103594.pdf, Connector Type="USB - micro B", Features="Shielded, Solder Retention", Gender=Receptacle, Ingress Protection=-, Manufacturer Part Number=10103594-0001LF, Micro USB B=Value, Mounting Type="Surface Mount, Right Angle, Horizontal", Notes="Similar to", Number of Contacts=5, Packaging="Cut Tape (CT)", Pricing 1="1=1.1, 10=0.768, 100=0.517, 250=0.43912, 500=0.41716 (USD)", RoHS="RoHS Compliant", Specifications="USB 2.0", Stock 1=23288, Supplier 1=Digi-Key
J3: library part CORTEX-DEBUG, "SAMTEC - FTSH-105-01-F-DV - .050 X .050", Manufacturer=SAMTEC, Supplier Part Number 1=01R3399, Category=Connectors, Manufacturer Part Number=FTSH-105-01-F-DV, Pricing 1="1=0.974, 25000=0.835, 50000=0.774 (USD)", Stock 1=0, Supplier 1=Newark
L1: "FIXED IND 4.7UH 520MA 650 MOHM", Case Code (Imperial)=0805, Case Code (Metric)=2012, Current Rating=520mA, DC Resistance (DCR)=650mR, Inductance=4.7uH, Inductance Tolerance=20%, Manufacturer="Taiyo Yuden", Max Operating Temperature=105°C, Min Operating Temperature=-40°C, Package Quantity=3000, Saturation Current=360mA, Self Resonant Frequency=45MHz, Supplier Part Number 1=587-1602-1-ND, Test Frequency=7.96MHz, Case/Package=0805, ComponentLink1Description=https://datasheet.ciiva.com/15981/214cbc2012t4r7m-15981637.pdf?src-supplier=Onlinecomponents.com, ComponentLink1URL=https://datasheet.ciiva.com/15981/214cbc2012t4r7m-15981637.pdf?src-supplier=Onlinecomponents.com, ComponentLink2Description=https://datasheet.ciiva.com/1040/cbc2012t4r7m-ss-1040456.pdf?src-supplier=Digi-Key, ComponentLink2URL=https://datasheet.ciiva.com/1040/cbc2012t4r7m-ss-1040456.pdf?src-supplier=Digi-Key, ComponentLink3Description=https://datasheet.ciiva.com/8505/cbc2012t4r7m-ss-8505656.pdf?src-supplier=Avnet, ComponentLink3URL=https://datasheet.ciiva.com/8505/cbc2012t4r7m-ss-8505656.pdf?src-supplier=Avnet, ComponentLink4Description=https://datasheet.ciiva.com/8001/wound02-e-8001849.pdf?src-supplier=Element14, ComponentLink4URL=https://datasheet.ciiva.com/8001/wound02-e-8001849.pdf?src-supplier=Element14, Composition=Wirewound, Core Material=Ferrite, Halogen Free="Halogen Free", Height=1.25mm, Height - Seated (Max)=0.057inch, Lead Free=Exempt, Length=0.079inch, Manufacturer Part Number=CBC2012T4R7M, Max DC Current=520mA, Mount="Surface Mount", Number of Pins=2, Packaging="Tape and Reel", Pricing 1="1=0.24000, 10=0.21600, 100=0.14860, 500=0.12702, 1000=0.09729 (USD)", REACH SVHC="No SVHC", RoHS=Yes, Shielding=Unshielded, Stock 1=7720, Supplier 1=Digi-Key, Termination=SMD/SMT, Tolerance=20%, Width=0.049inch
L2 L3: library part NRH3012T2R2MN, "Inductor 2.2µH 1.5A", Inductance (uH)=2.2, Manufacturer="Taiyo Yuden", Package=NRH3012, Rating=-, Sort Value=2.2_1.5, Sort Value Package=2.2_1.5_NRH3012, Supplier Part Number 1=587-2589-1-ND, Tolerance=±20%, Category=Inductors, CategorySort=300, ComponentLink1Description="External Datasheet", ComponentLink1URL=https://www.yuden.co.jp/productdata/catalog/en/wound04_e.pdf, DCR Max (Ohms)="90 mOhm Max", Height (mm)=1.2MM, IRMS=1.37, Isat (A)=1.5, Manufacturer Part Number=NRH3012T2R2MN, Part Number=NRH3012T2R2MN, Shielding=Sheilded, SRF typ (MHz)=78MHz, Supplier 1=Digikey, Supplier Unit Price 1=0.28
P1 P2 P3 P4 P5 P6 P7 P8 P9 P10 P11 P12 P13 P14 P15 P16 P20 P21 P22 P23 P24 P25 P26 P27 P28 P29 P30 P31 P32 P33 P34 P35 P36 P37 P38 P39 P40 P41 P42 P43 P44 P45 P46 P47 P48: library part CASTELLATED
Q1: "MOSFET N-CH 30V 1.8A SOT23-3", Current - Continuous Drain (Id) @ 25° C=1.8A, Drain to Source Voltage (Vdss)=30V, Input Capacitance (Ciss) @ Vds="190pF @ 25V", Manufacturer=Diodes/Zetex, Package / Case="SOT-23-3, TO-236-3, Micro3™, SSD3, SST3", Power - Max=625mW, Supplier Part Number 1=ZXMN3A01FCT-ND, Category="Discrete Semiconductor Products", ComponentLink1Description=http://www.diodes.com/datasheets/ZXMN3A01F.pdf, ComponentLink1URL=http://www.diodes.com/datasheets/ZXMN3A01F.pdf, FET Feature="Logic Level Gate", FET Type="MOSFET N-Channel, Metal Oxide", Gate Charge (Qg) @ Vgs="3.9nC @ 10V", Manufacturer Part Number=ZXMN3A01FTA, Mounting Type="Surface Mount", Packaging="Cut Tape (CT)", Pricing 1="1=0.55, 10=0.44, 100=0.33, 250=0.285, 500=0.245, 1000=0.19 (USD)", Rds On (Max) @ Id, Vgs="120 mOhm @ 2.5A, 10V", RoHS="RoHS Compliant", Stock 1=33955, Supplier 1=Digi-Key, Vgs(th) (Max) @ Id="1V @ 250µA"
R1: library part ERJ-2RKF1002X, "RES 10K OHM 1/10W 1% 0402 SMD", Limiting Element Voltage=50, Manufacturer="Panasonic Electronic Components", Maximum Overload Voltage=100, Maximum Working Voltage=31.6V, Package="0402 (1005 Metric)", Package Power="0402  (0.1W)", Power (Watts)="0.1W- 1/10W", Ratings=AEC-Q200, Sort Value=10000, Sort Value Package=402_10000, Supplier Package=0402, Supplier Part Number 1=P10.0KLCT-ND, Temperature Coefficient=±100ppm/°C, Tolerance=±1%, Category=Resistors, ComponentLink1Description="Internal Datasheet", ComponentLink1URL="datasheets\Panasonic Electronic Components\AOA0000CE2.pdf", ComponentLink2Description="External Datasheet", ComponentLink2URL=http://industrial.panasonic.com/www-data/pdf/AOA0000/AOA0000CE2.pdf, Composition="Thick Film", Features=-, Height=0.40MM, Manufacturer Part Number=ERJ-2RKF1002X, Number of Terminations=2, Packaging="Cut Tape (CT)", Resistance (Ohms)=10k, Size / Dimension="0.039\" L x 0.020\" W (1.00mm x 0.50mm)", Substitution Notes="10k , ±1% , 0402 , AEC-Q200", Supplier 1=Digi-Key
R2 R5: library part ERJ-2RKF2002X, "RES 20K OHM 1/10W 1% 0402 SMD", Limiting Element Voltage=50, Manufacturer="Panasonic Electronic Components", Maximum Overload Voltage=100, Maximum Working Voltage=44.7V, Package="0402 (1005 Metric)", Package Power="0402  (0.1W)", Power (Watts)="0.1W- 1/10W", Ratings=AEC-Q200, Sort Value=20000, Sort Value Package=402_20000, Supplier Package=0402, Supplier Part Number 1=P20.0KLCT-ND, Temperature Coefficient=±100ppm/°C, Tolerance=±1%, Category=Resistors, ComponentLink1Description="Internal Datasheet", ComponentLink1URL="datasheets\Panasonic Electronic Components\AOA0000CE2.pdf", ComponentLink2Description="External Datasheet", ComponentLink2URL=http://industrial.panasonic.com/www-data/pdf/AOA0000/AOA0000CE2.pdf, Composition="Thick Film", Features=-, Height=0.40MM, Manufacturer Part Number=ERJ-2RKF2002X, Number of Terminations=2, Packaging="Cut Tape (CT)", Resistance (Ohms)=20k, Size / Dimension="0.039\" L x 0.020\" W (1.00mm x 0.50mm)", Substitution Notes="20k , ±1% , 0402 , AEC-Q200", Supplier 1=Digi-Key
R3 R4: library part ERJ-2RKF2201X, "RES 2.2K OHM 1/10W 1% 0402 SMD", Limiting Element Voltage=50, Manufacturer="Panasonic Electronic Components", Maximum Overload Voltage=100, Maximum Working Voltage=14.8V, Package="0402 (1005 Metric)", Package Power="0402  (0.1W)", Power (Watts)="0.1W- 1/10W", Ratings=AEC-Q200, Sort Value=2200, Sort Value Package=402_2200, Supplier Package=0402, Supplier Part Number 1=P2.20KLCT-ND, Temperature Coefficient=±100ppm/°C, Tolerance=±1%, Category=Resistors, ComponentLink1Description="Internal Datasheet", ComponentLink1URL="datasheets\Panasonic Electronic Components\AOA0000CE2.pdf", ComponentLink2Description="External Datasheet", ComponentLink2URL=http://industrial.panasonic.com/www-data/pdf/AOA0000/AOA0000CE2.pdf, Composition="Thick Film", Features=-, Height=0.40MM, Manufacturer Part Number=ERJ-2RKF2201X, Number of Terminations=2, Packaging="Cut Tape (CT)", Resistance (Ohms)=2.2k, Size / Dimension="0.039\" L x 0.020\" W (1.00mm x 0.50mm)", Substitution Notes="2.2k , ±1% , 0402 , AEC-Q200", Supplier 1=Digi-Key
R6 R7 R9 R10 R11: library part ERJ-2GE0R00X, "RES 0.0 OHM 1/10W JUMP 0402 SMD", Limiting Element Voltage=50, Manufacturer="Panasonic Electronic Components", Maximum Overload Voltage=100, Maximum Working Voltage=0.0V, Package="0402 (1005 Metric)", Package Power="0402  (0.1W)", Power (Watts)="0.1W- 1/10W", Ratings=AEC-Q200, Sort Value Package=402_0, Supplier Package=0402, Supplier Part Number 1=P0.0JCT-ND, Temperature Coefficient=-, Tolerance=Jumper, Category=Resistors, ComponentLink1Description="Internal Datasheet", ComponentLink1URL="datasheets\Panasonic Electronic Components\AOA0000CE1.pdf", ComponentLink2Description="External Datasheet", ComponentLink2URL=http://industrial.panasonic.com/www-data/pdf/AOA0000/AOA0000CE1.pdf, Composition="Thick Film", Features=-, Height=0.40MM, Manufacturer Part Number=ERJ-2GE0R00X, Number of Terminations=2, Resistance (Ohms)=0, Size / Dimension="0.039\" L x 0.020\" W (1.00mm x 0.50mm)", Sort Value=0, Substitution Notes="0 , Jumper , 0402 , AEC-Q200", Supplier 1=Digi-Key
R8 R12 R13 R14: library part ERJ-2RKF1003X, "RES 100K OHM 1/10W 1% 0402 SMD", Limiting Element Voltage=50, Manufacturer="Panasonic Electronic Components", Maximum Overload Voltage=100, Maximum Working Voltage=50.0V, Package="0402 (1005 Metric)", Package Power="0402  (0.1W)", Power (Watts)="0.1W- 1/10W", Ratings=AEC-Q200, Sort Value=100000, Sort Value Package=402_100000, Supplier Package=0402, Supplier Part Number 1=P100KLCT-ND, Temperature Coefficient=±100ppm/°C, Tolerance=±1%, Category=Resistors, ComponentLink1Description="Internal Datasheet", ComponentLink1URL="datasheets\Panasonic Electronic Components\AOA0000CE2.pdf", ComponentLink2Description="External Datasheet", ComponentLink2URL=http://industrial.panasonic.com/www-data/pdf/AOA0000/AOA0000CE2.pdf, Composition="Thick Film", Features=-, Height=0.40MM, Manufacturer Part Number=ERJ-2RKF1003X, Number of Terminations=2, Packaging="Cut Tape (CT)", Resistance (Ohms)=100k, Size / Dimension="0.039\" L x 0.020\" W (1.00mm x 0.50mm)", Substitution Notes="100k , ±1% , 0402 , AEC-Q200", Supplier 1=Digi-Key
R15: library part ERJ-2RKF33R0X, "RES 33 OHM 1/10W 1% 0402 SMD", Limiting Element Voltage=50, Manufacturer="Panasonic Electronic Components", Maximum Overload Voltage=100, Maximum Working Voltage=1.8V, Package="0402 (1005 Metric)", Package Power="0402  (0.1W)", Power (Watts)="0.1W- 1/10W", Ratings=AEC-Q200, Sort Value Package=402_33, Supplier Package=0402, Supplier Part Number 1=P33.0LCT-ND, Temperature Coefficient=±100ppm/°C, Tolerance=±1%, Category=Resistors, ComponentLink1Description="Internal Datasheet", ComponentLink1URL="datasheets\Panasonic Electronic Components\AOA0000CE2.pdf", ComponentLink2Description="External Datasheet", ComponentLink2URL=http://industrial.panasonic.com/www-data/pdf/AOA0000/AOA0000CE2.pdf, Composition="Thick Film", Features=-, Height=0.40MM, Manufacturer Part Number=ERJ-2RKF33R0X, Number of Terminations=2, Packaging="Cut Tape (CT)", Resistance (Ohms)=33, Size / Dimension="0.039\" L x 0.020\" W (1.00mm x 0.50mm)", Sort Value=33, Substitution Notes="33 , ±1% , 0402 , AEC-Q200", Supplier 1=Digi-Key
R16: library part ERJ-2RKF1001X, "RES 1K OHM 1/10W 1% 0402 SMD", Limiting Element Voltage=50, Manufacturer="Panasonic Electronic Components", Maximum Overload Voltage=100, Maximum Working Voltage=10.0V, Package="0402 (1005 Metric)", Package Power="0402  (0.1W)", Power (Watts)="0.1W- 1/10W", Ratings=AEC-Q200, Sort Value=1000, Sort Value Package=402_1000, Supplier Package=0402, Supplier Part Number 1=P1.00KLCT-ND, Temperature Coefficient=±100ppm/°C, Tolerance=±1%, Category=Resistors, ComponentLink1Description="Internal Datasheet", ComponentLink1URL="datasheets\Panasonic Electronic Components\AOA0000CE2.pdf", ComponentLink2Description="External Datasheet", ComponentLink2URL=http://industrial.panasonic.com/www-data/pdf/AOA0000/AOA0000CE2.pdf, Composition="Thick Film", Features=-, Height=0.40MM, Manufacturer Part Number=ERJ-2RKF1001X, Number of Terminations=2, Packaging="Cut Tape (CT)", Resistance (Ohms)=1k, Size / Dimension="0.039\" L x 0.020\" W (1.00mm x 0.50mm)", Substitution Notes="1k , ±1% , 0402 , AEC-Q200", Supplier 1=Digi-Key
SW1 SW2 SW3: "NIDEC COPAL ELECTRONICS - CHS-01TA - DIP SWITCH, 1POS, SPST, SLIDE, SMD", Current Rating=100mA, Manufacturer="Nidec Copal", Max Operating Temperature=85°C, Max Voltage Rating (DC)=24V, Min Operating Temperature=-40°C, Voltage Rating (DC)=6V, Actuator Type="Slide (Standard)", Body Material=Polyphenylene, Category="DIP Switches", ComponentLink1Description=https://datasheet.ciiva.com/2863/chs-2863448.pdf?src-supplier=Digi-Key, ComponentLink1URL=https://datasheet.ciiva.com/2863/chs-2863448.pdf?src-supplier=Digi-Key, ComponentLink2Description=https://datasheet.ciiva.com/2863/chs-2863449.pdf?src-supplier=Digi-Key, ComponentLink2URL=https://datasheet.ciiva.com/2863/chs-2863449.pdf?src-supplier=Digi-Key, ComponentLink3Description=https://datasheet.ciiva.com/2863/chs-2863450.pdf?src-supplier=Digi-Key, ComponentLink3URL=https://datasheet.ciiva.com/2863/chs-2863450.pdf?src-supplier=Digi-Key, Contact Material="Copper Alloy", Contact Plating=Gold, Electrical Life=2000Cycles, Lead Free="Lead Free", Length=0.098inch, Manufacturer Part Number=CHS-01TA, Mount="Surface Mount", Number of Positions=1, Orientation=Vertical, Packaging="Tape and Reel", Pitch=0.05inch, Pricing 1="1000=0.57079, 2000=0.57024, 4000=0.56944, 6000=0.46309, 8000=0.46247 (USD)", RoHS=Yes, Stock 1=19000, Supplier 1=Avnet, Supplier Part Number 1=CHS-01TA, Termination=J-Hook, Throw Configuration=SPST, Washable=Yes
U1: "SOC i.MX ARM Cortex M33 176-Pin VFBGA Tray", Manufacturer="NXP Semiconductors", Package=None, Availability=Warning, Check_prices=https://www.snapeda.com/parts/MIMXRT633SFVKB/Nexperia/view-part/5163781/?ref=eda, Manufacturer Part Number=MIMXRT685SFVKB, Price=None, Purchase-URL=https://pricing.snapeda.com/search/part/MIMXRT633SFVKB/?ref=eda, SnapEDA_Link=https://www.snapeda.com/parts/MIMXRT633SFVKB/Nexperia/view-part/5163781/?ref=snap